# Altium PCB RFID_CC1101_433MHz.PcbDoc
Units mm, origin at the board's own origin, x right, y up, seen from the top; angles counter-clockwise.
Board outline 54 x 60 mm, 4 copper layers (Top Layer, GND Plane, POWER Plane, Bottom Layer), stack 0.414 mm thick; 90 components, 70 nets, 273 pads, 160 vias.
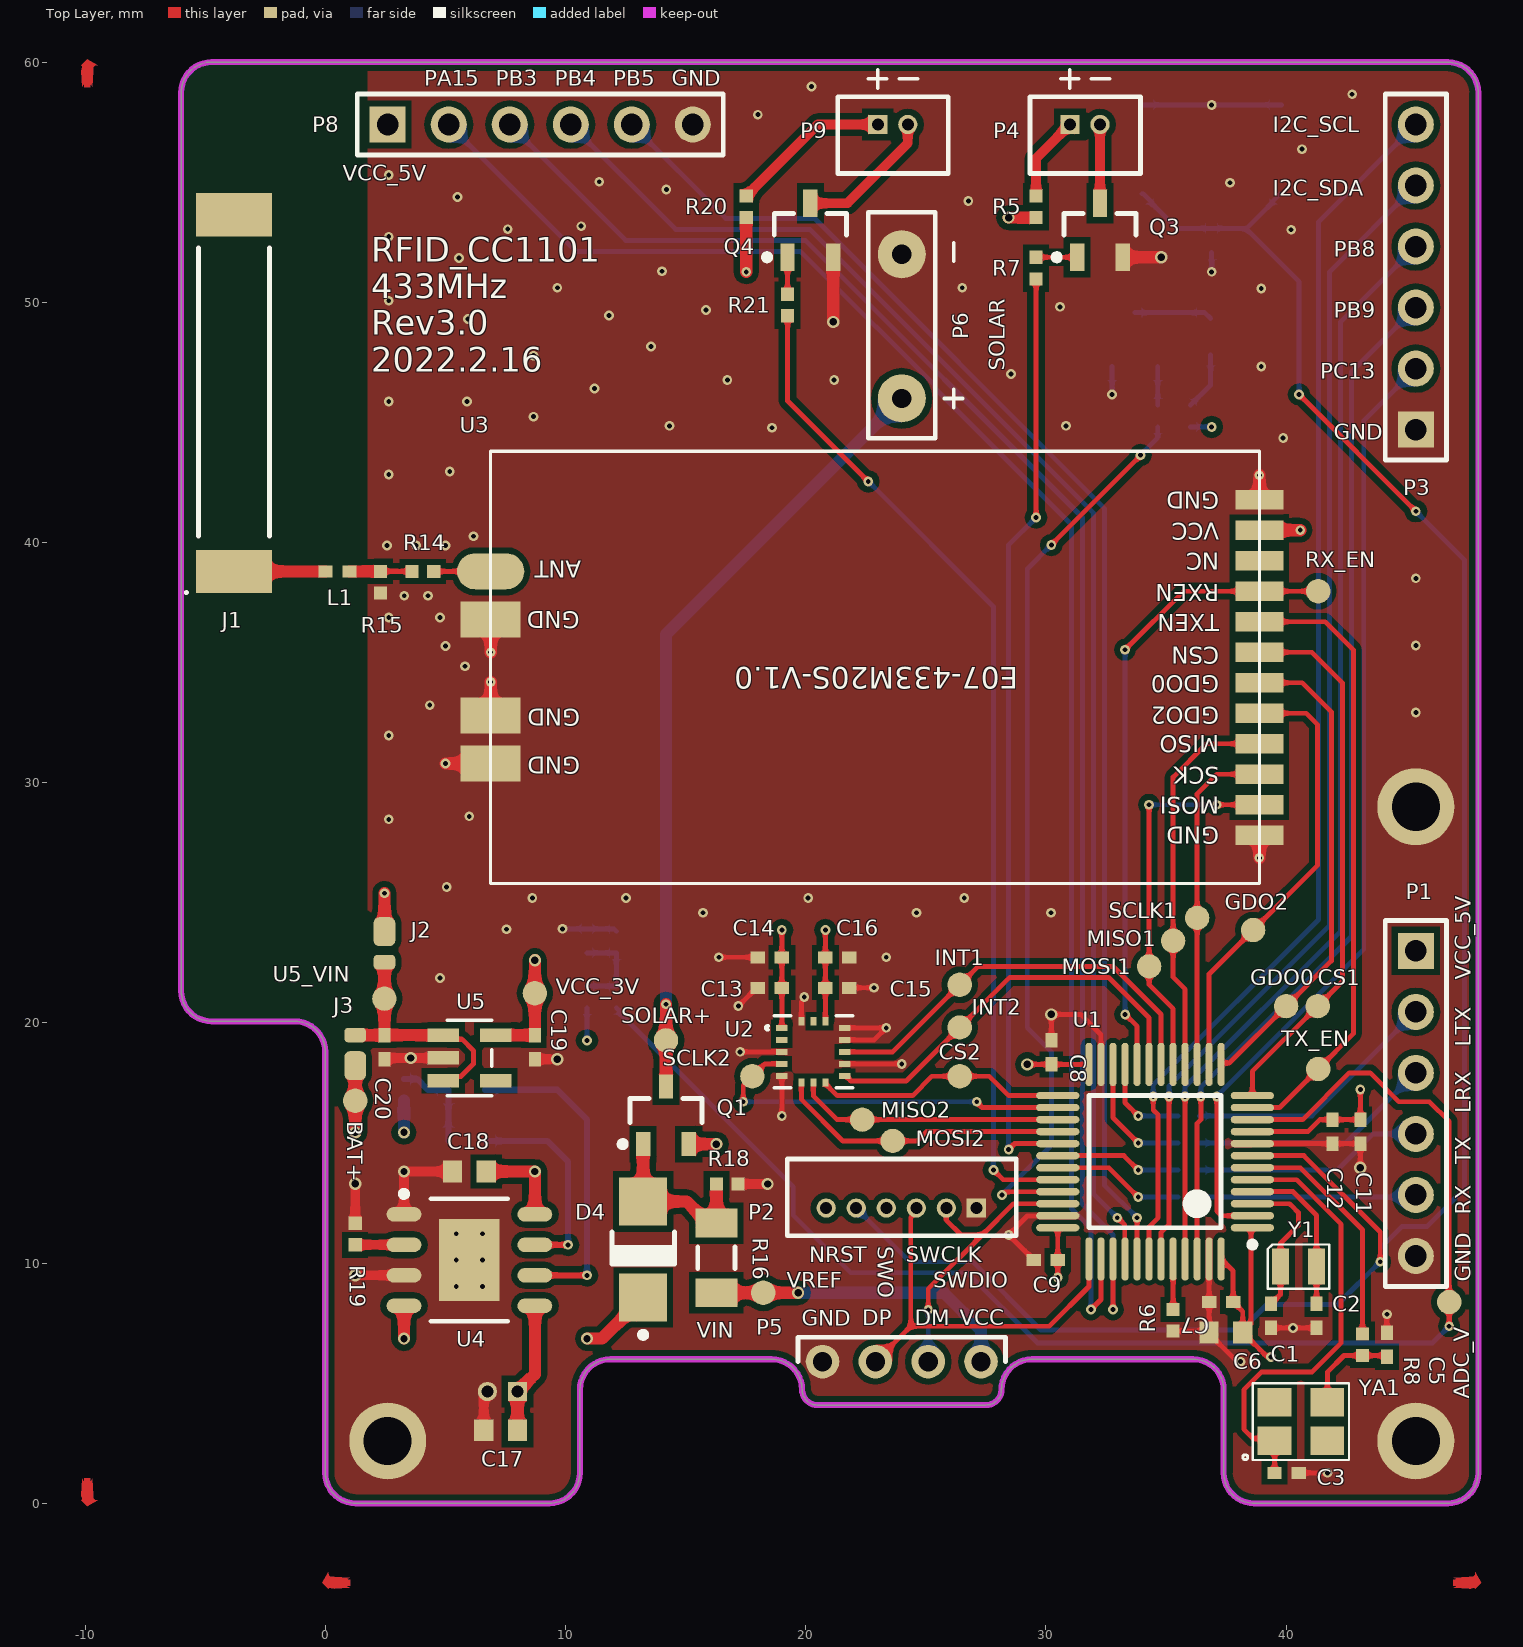
[diagram p0: Top Layer view]
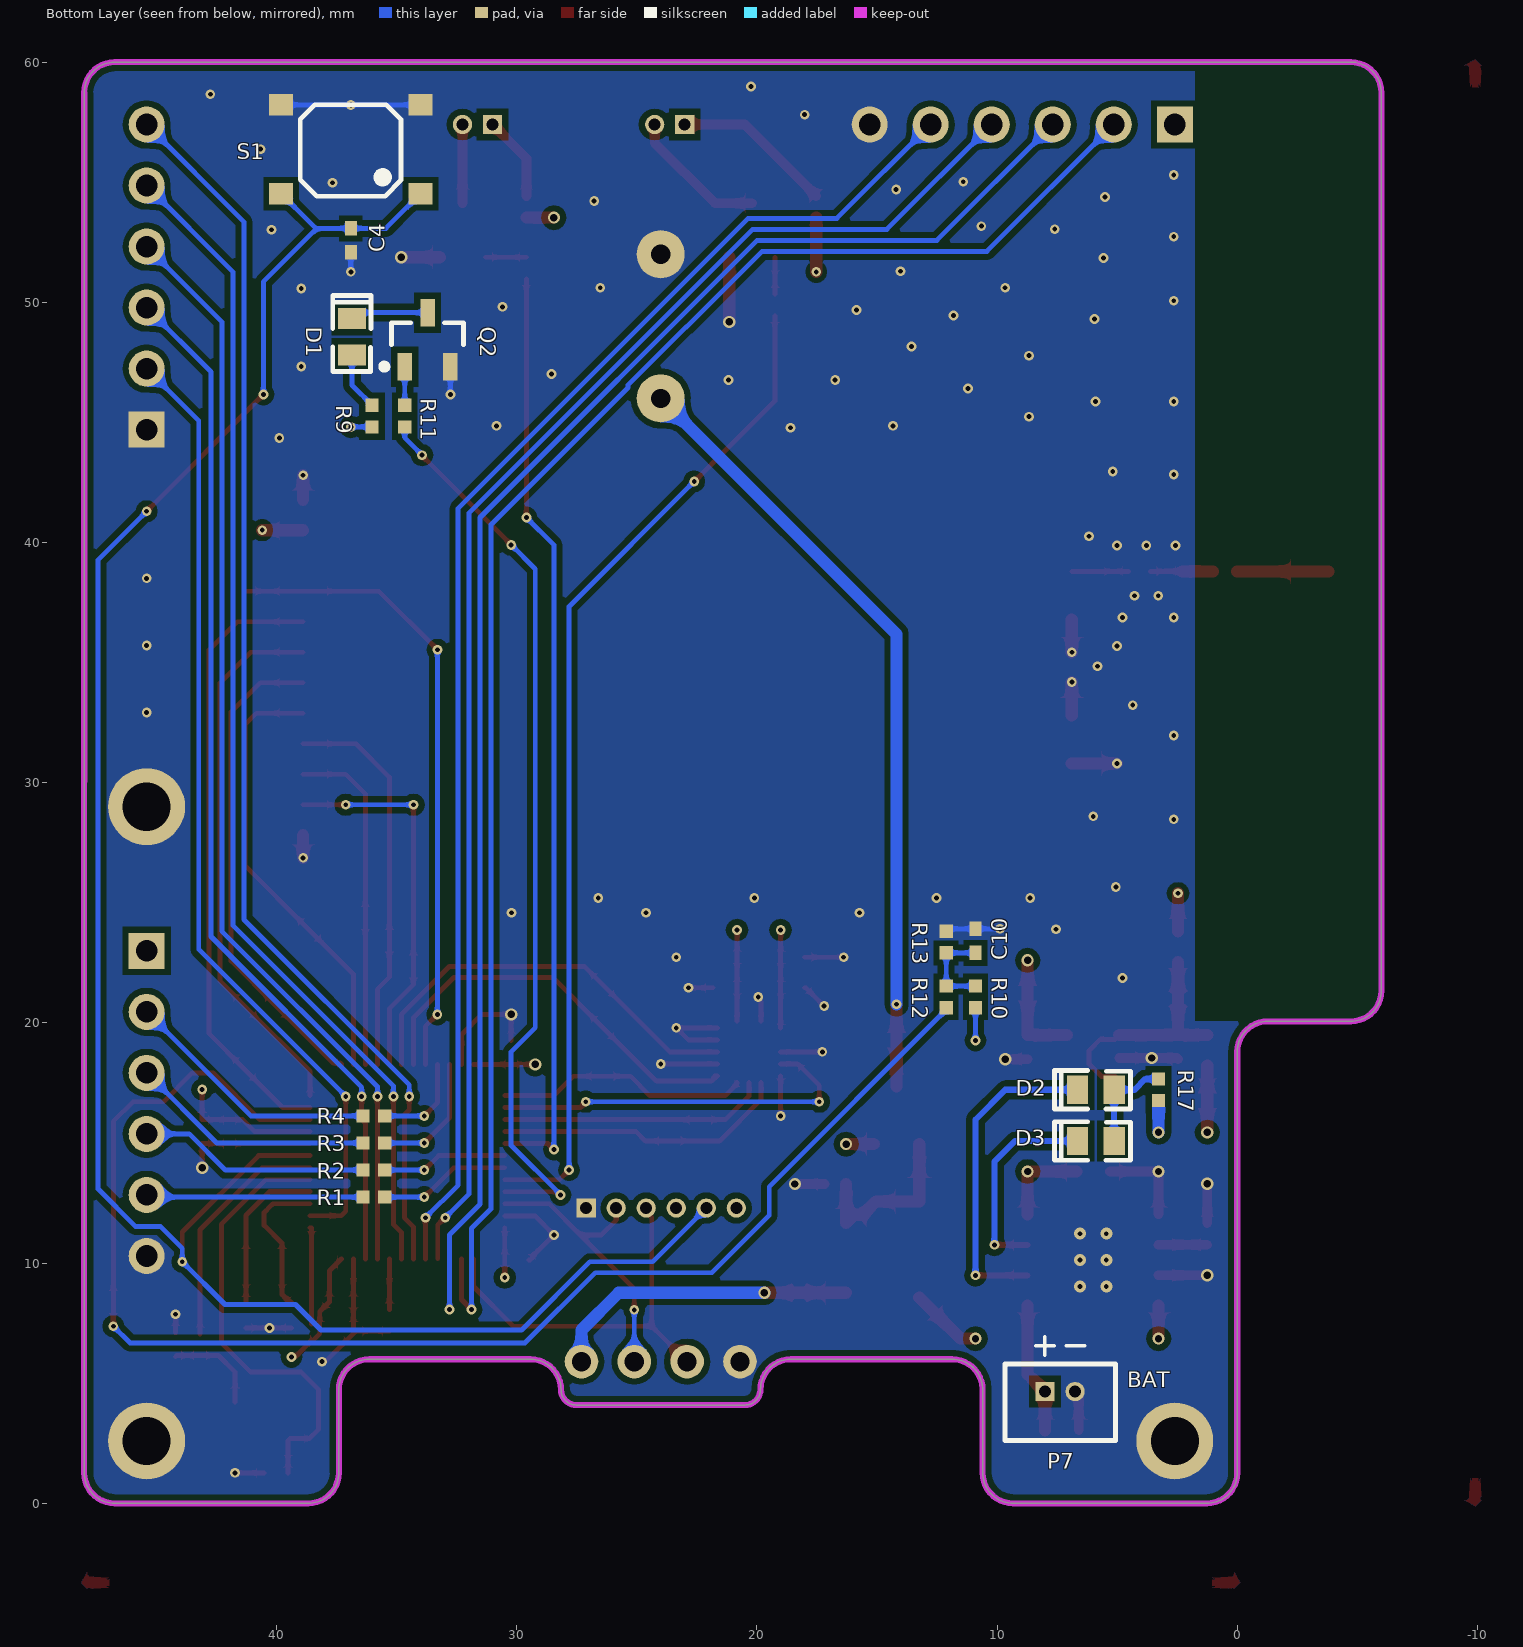
[diagram p1: Bottom Layer view, seen from below]
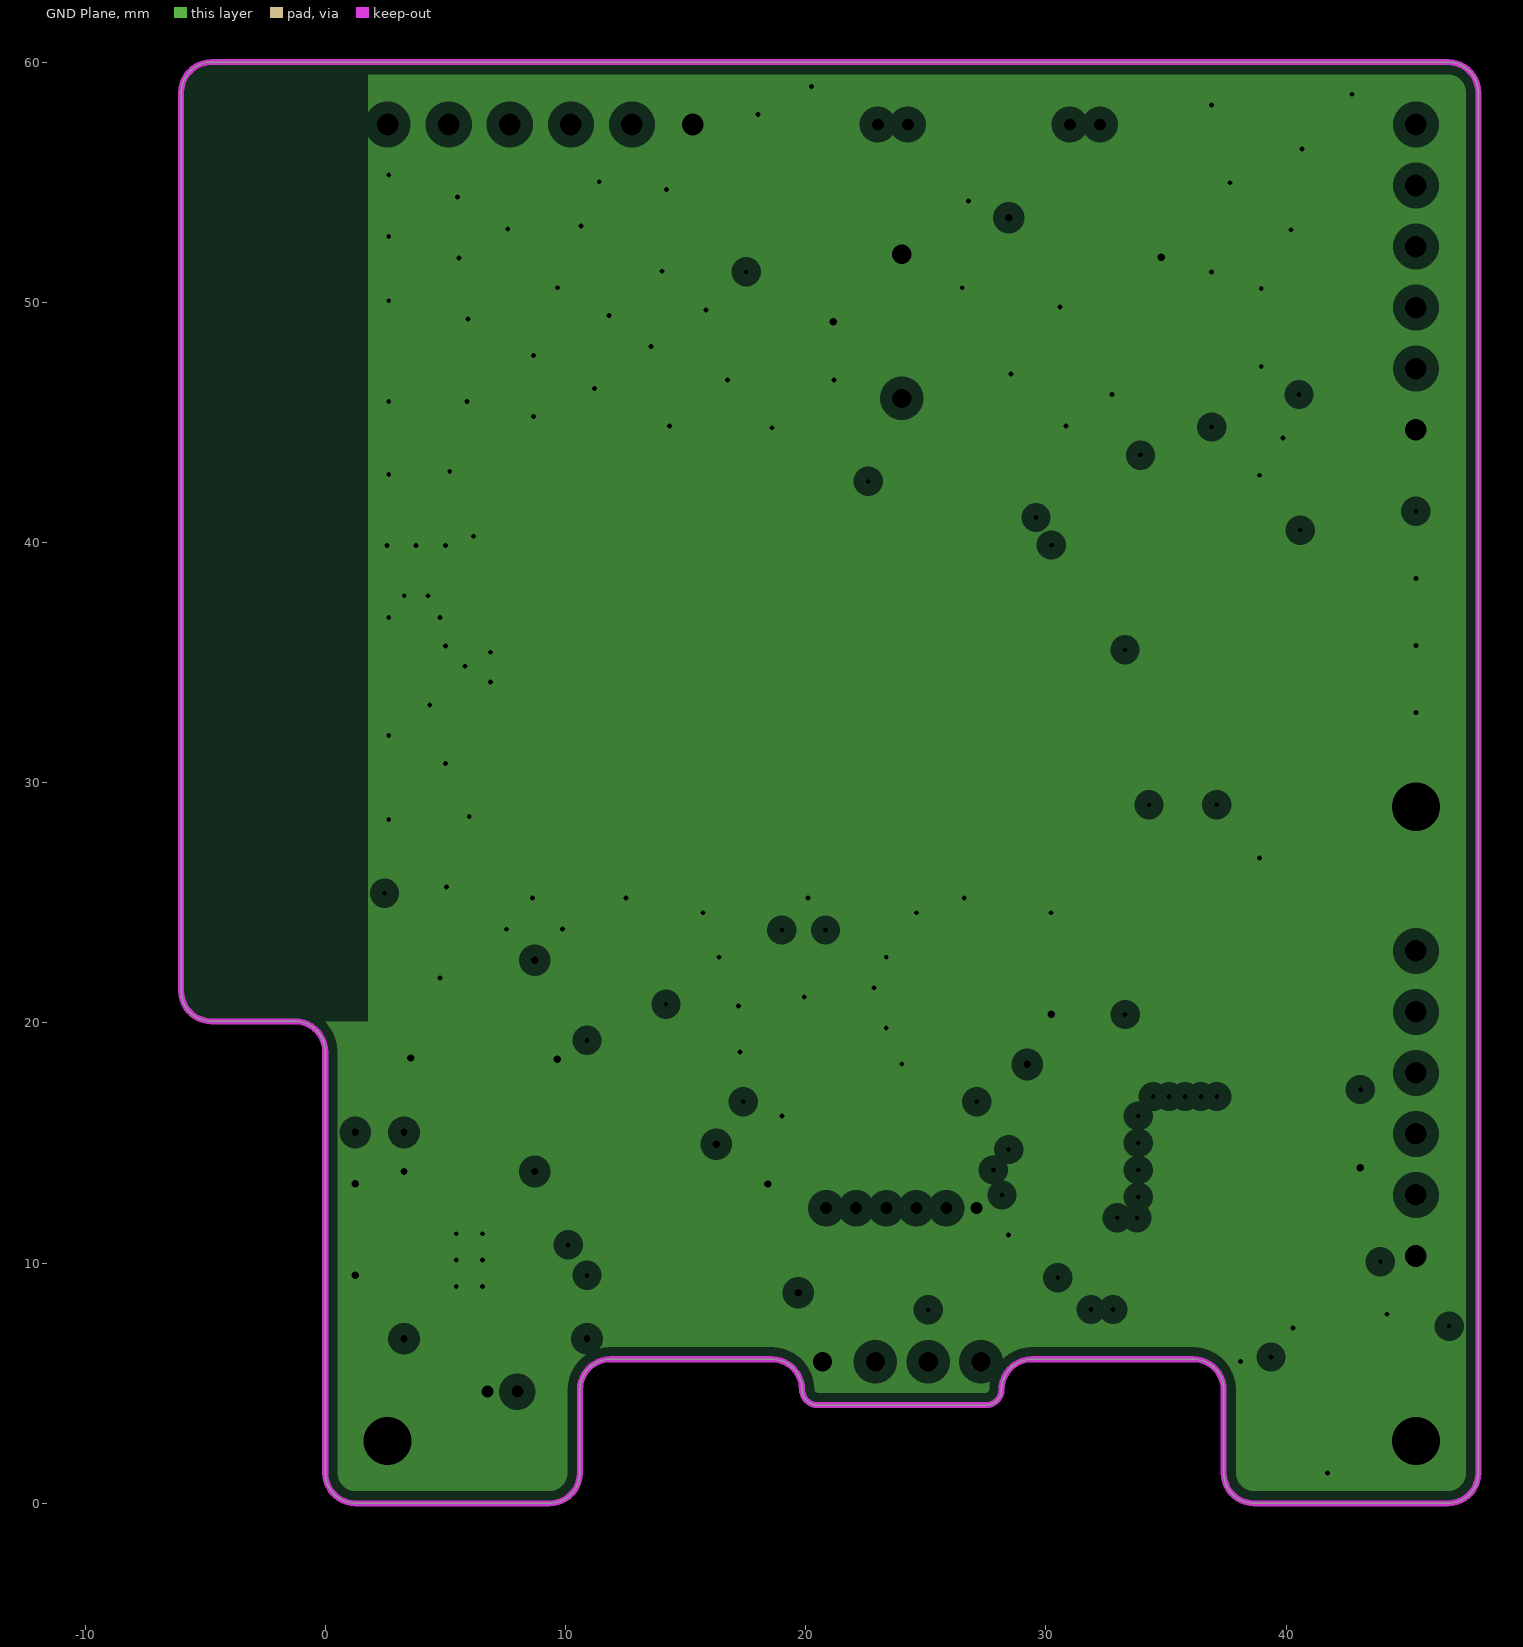
[diagram p2: GND Plane, clearances drawn from the general rule]
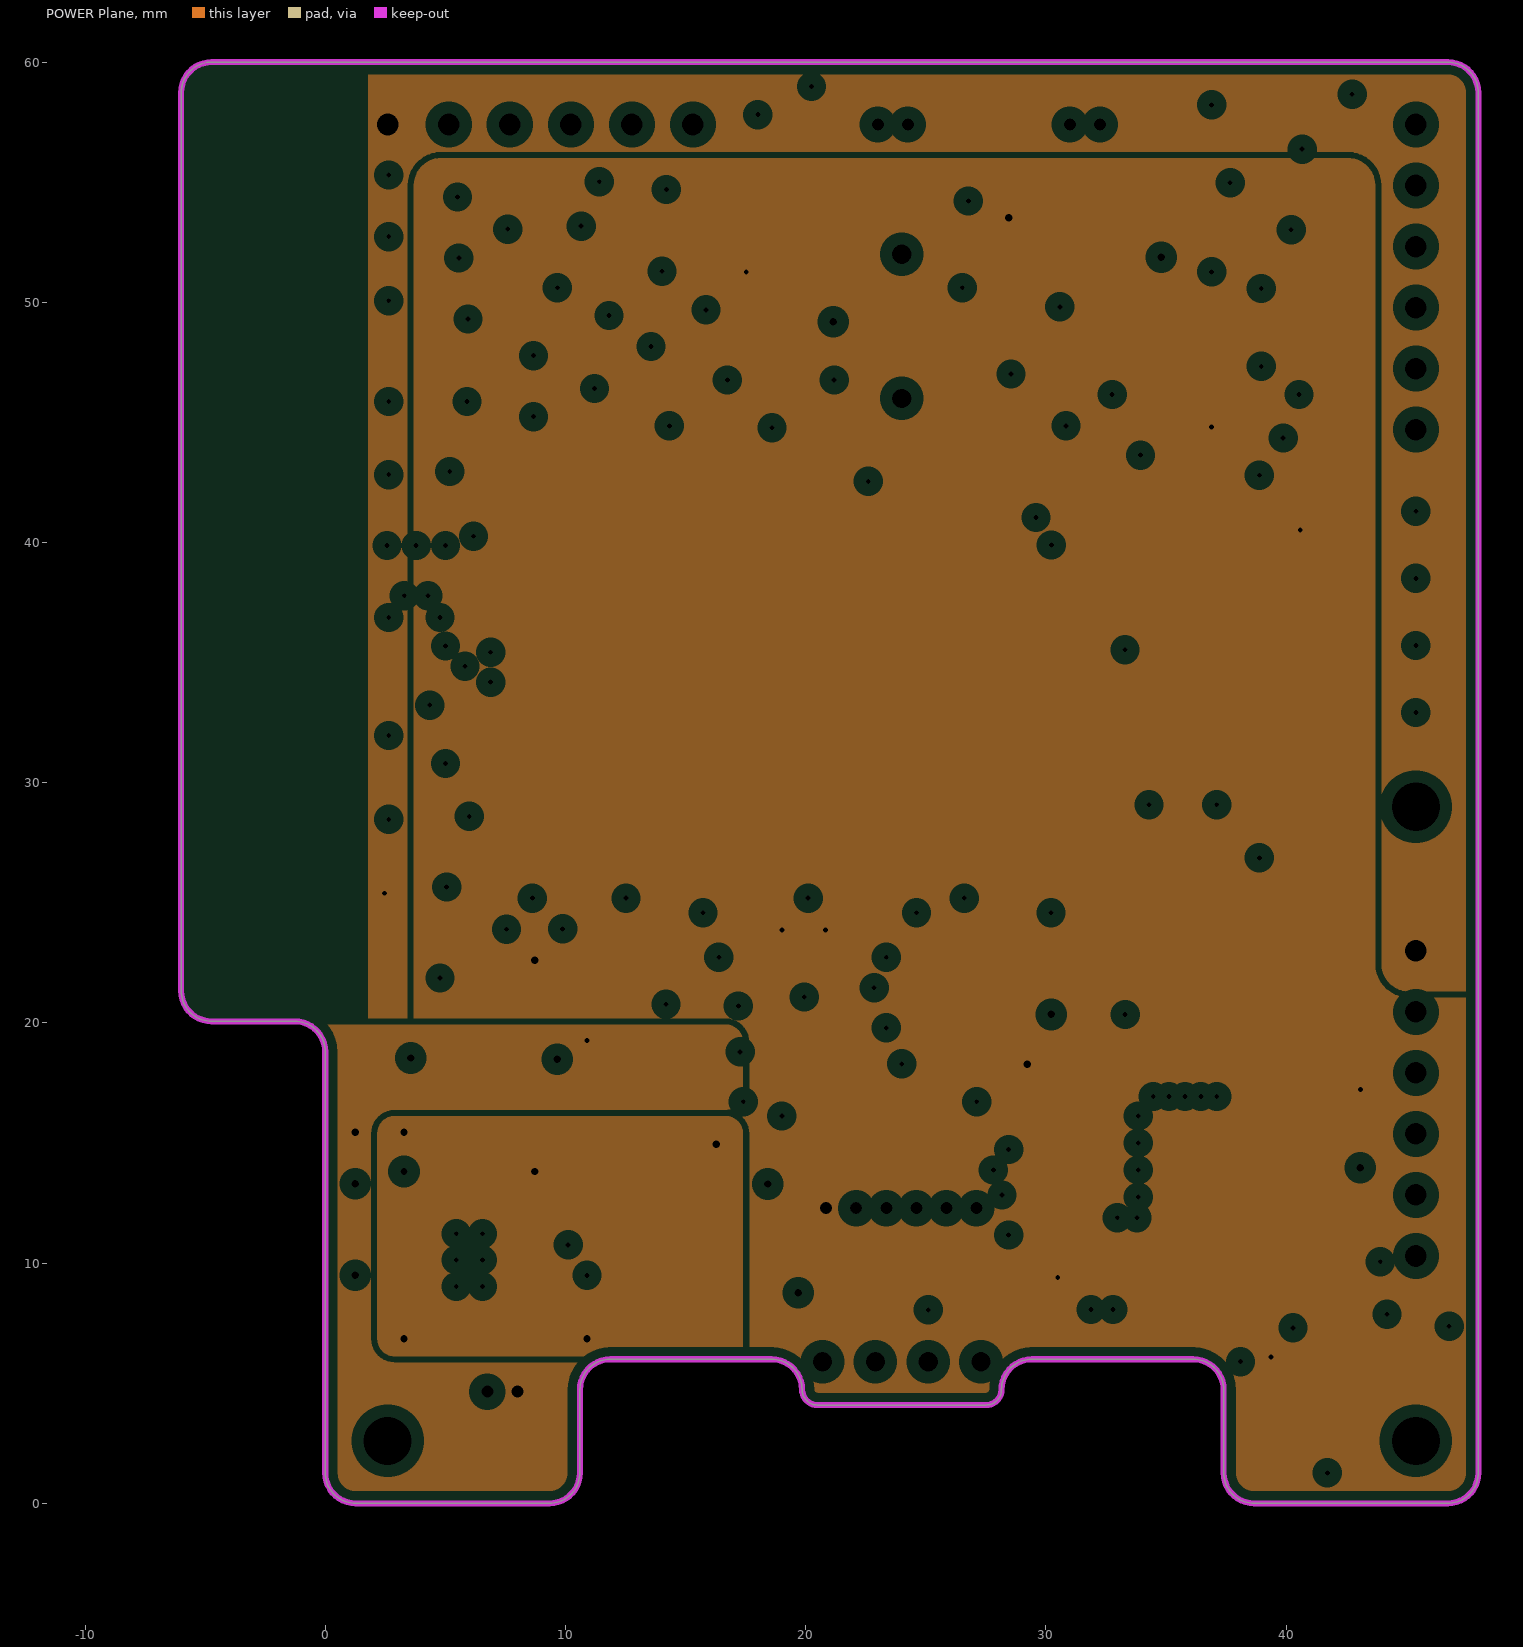
[diagram p3: POWER Plane, clearances drawn from the general rule]
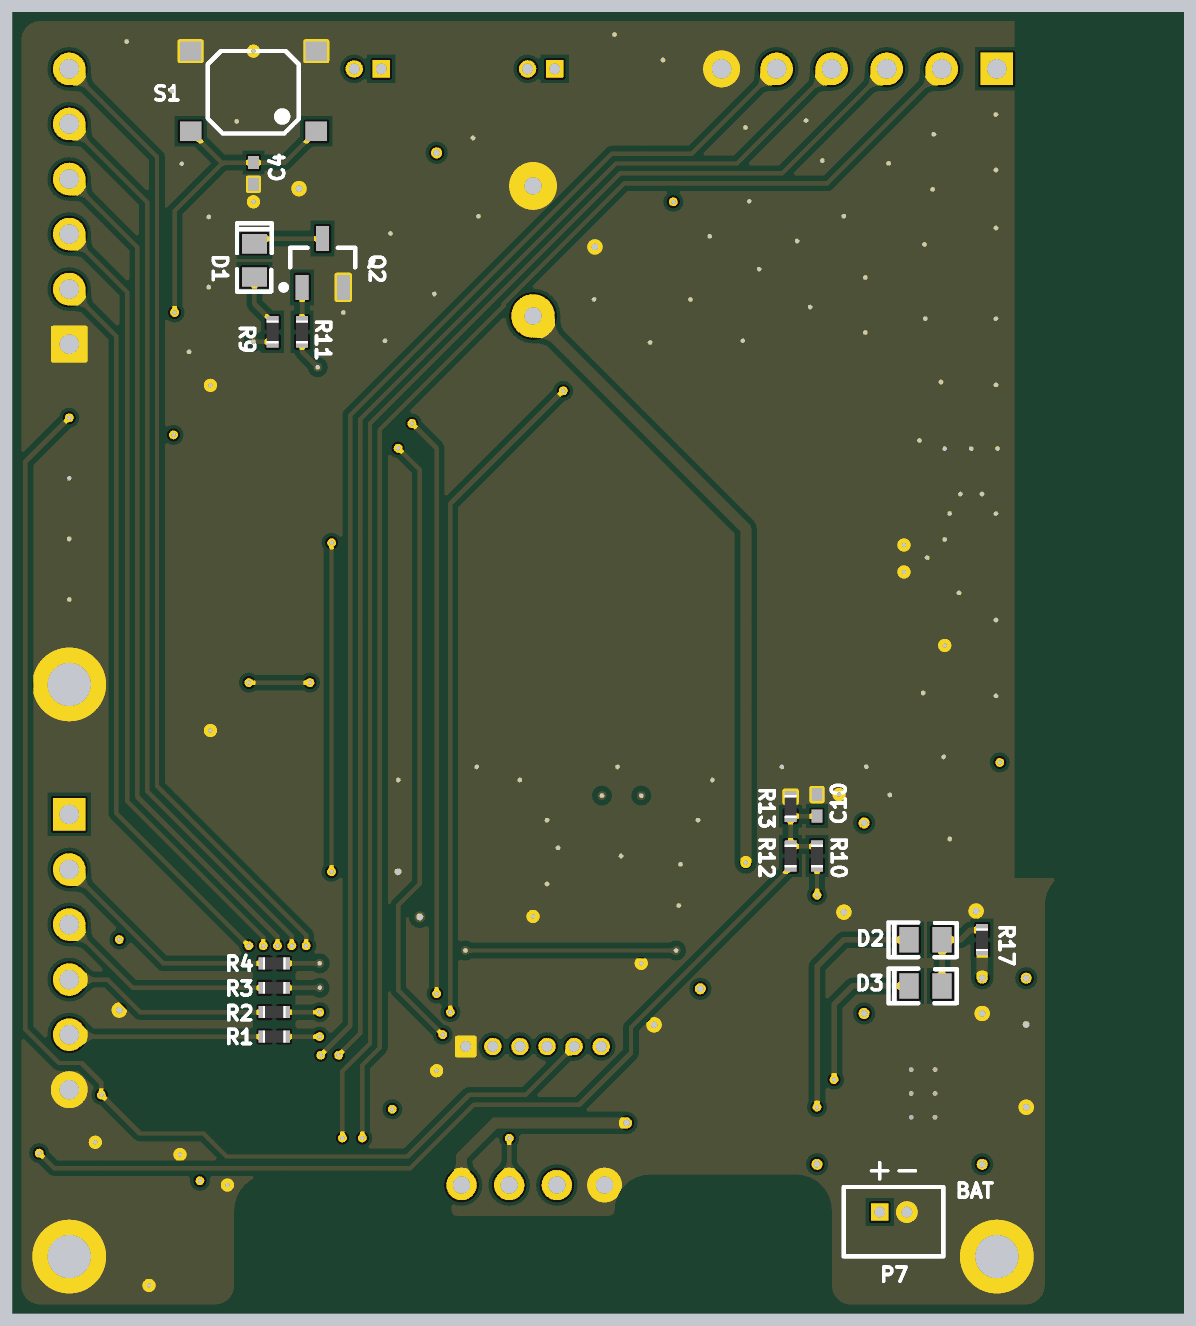
[diagram p4: 3D render of the assembled board from below, using the file's embedded part models]

## Layer stack, top to bottom
Top Solder: solder mask 0.0102, Solder Resist, Dk 3.5
Top Layer: signal copper 0.035
Dielectric 1: core 0.1016, Core-009, Dk 4.5
GND Plane: plane copper 0.035, net GND
Dielectric 3: prepreg 0.0711, PP-006, Dk 4.1
POWER Plane: plane copper 0.035, net (Multiple Nets)
Dielectric 2: core 0.1016, Core-009, Dk 4.5
Bottom Layer: signal copper 0.035
Bottom Solder: solder mask 0.0102, Solder Resist, Dk 3.5

## Board outline
1.27,0 9.33,0 ccw(c9.33,1.27) 10.6,1.27 10.6,4.73 cw(c11.87,4.73) 11.87,6 18.58,6 cw(c18.58,4.73) 19.85,4.73 ccw(c20.485,4.73) 20.485,4.095 27.515,4.095 ccw(c27.515,4.73) 28.15,4.73 cw(c29.42,4.73) 29.42,6 36.13,6 cw(c36.13,4.73) 37.4,4.73 37.4,1.27 ccw(c38.67,1.27) 38.67,0 46.73,0 ccw(c46.73,1.27) 48,1.27 48,58.727 ccw(c46.733,58.73) 46.736,59.997 46.736,60 -4.73,60 ccw(c-4.73,58.73) -6,58.73 -6,21.336 ccw(c-4.73,21.336) -4.73,20.066 -1.27,20.066 cw(c-1.27,18.796) 0,18.796 0,1.27 ccw(c1.27,1.27)

## Design rules (kind name [scope] priority, off if disabled: settings)
Clearance Clearance_8mil [(IsPad and InComponent('U1')) or (IsPad and InComponent('U2'))] p1: gap=0.203 ignorepadtopadclearanceinfootprint=TRUE
Clearance [All] p2: gap=0.254 ignorepadtopadclearanceinfootprint=FALSE except(0: Arc-Hole Track-Hole SMDPad-Hole THPad-Hole Via-Hole Fill-Hole Poly-Hole Region-Hole Text-Hole)
MinimumSolderMaskSliver [All] p1: minsoldermaskwidth=0.025
PlaneClearance [All] p1: clearance=0.508
PlaneConnect [All] p1: planeconnectstyle=Direct reliefexpansion=0.508 reliefentries=4 reliefconductorwidth=0.254 reliefairgap=0.254
PolygonConnect [All] p1: connectstyle=Direct reliefconductorwidth=0.254 reliefentries=4 polygonreliefangle="90 Angle" airgapwidth=0.254
RoutingVias [All] p1: holewidth=0.305 width=0.508 viastyle="Through Hole" minholewidth=0.203 minwidth=0.406 maxholewidth=0.711 maxwidth=1.27
SilkToSilkClearance [All] p1: silktosilkclearance=0.127
SilkToSolderMaskClearance [IsPad] p1: minsilkscreentomaskgap=0 clearancetoexposedcopper=TRUE
SolderMaskExpansion [All] p1: expansion=0.102 istentingtop=FALSE
Width Width_LED [InNetClass('led class')] p1: maxlimit=0.508 minlimit=0.203 preferedwidth=0.406
Width "Width Power" [InNetClass('power class')] p2: maxlimit=0.508 minlimit=0.203 preferedwidth=0.508
Width [All] p3: maxlimit=1.016 minlimit=0.203 preferedwidth=0.254
25 further rules are at their usual default settings.

## Classes and differential pairs
net class "led class": NetP4_1 NetP4_2 NetP9_1 NetP9_2
net class "power class": BAT+ GND NetC20_2 NetP4_2 NetP5_1 NetR19_2 SOLAR+ VCC VCC_3V VCC_5V
component class Power: BAT+ C17 C18 C19 C20 D2 D3 D4 J2 J3 P5 P6 P7 Q1 R16 R17 R18 R19 SOLAR+ U4 U5 U5_VIN VCC_3V VIN
component class MEMS&RF: C13 C14 C15 C16 J1 L1 R14 R15 U2 U3
component class MCU: ADC_V C1 C2 C3 C4 C5 C6 C7 C8 C9 C10 C11 C12 CS1 CS2 D1 GDO0 GDO2 INT1 INT2 MISO1 MISO2 MOSI1 MOSI2 P1 P2 P3 P4 P8 P9 Q2 Q3 Q4 R1 R2 R3 R4 R5 R6 R7 R8 R9 R10 R11 R12 R13 R20 R21 RX_EN S1 SCLK1 SCLK2 TX_EN U1 Y1 YA1

## Components (designator, comment, footprint, x,y, rotation, side; value= is the part's Value field where it differs from the comment)
ADC_V "TP-EMB-SMT-Single-20mil-1pin" EMB-SMT-40MILX40MIL 46.787,8.382 r90 top
BAT+ "TP-EMB-SMT-Single-20mil-1pin" EMB-SMT-40MILX40MIL 1.245,16.764 r90 top
C1 "10pF" 0402 39.37,7.805 r90 top
C2 "10pF" 0402 41.266,7.805 r90 top
C3 "18pF" 0402 40.017,1.27 r180 top
C4 "100nF" 0402 36.9,52.578 r90 bottom
C5 "18pF" 0402 44.196,6.604 r270 top
C6 "10uF" 1608[0603] 37.494,7.112 r0 top
C7 "100nF" 0402 37.294,8.382 r0 top
C8 "100nF" 0402 30.226,18.774 r270 top
C9 "100nF" 0402 29.994,10.128 r0 top
C10 "100nF" 0402 10.897,23.418 r270 bottom
C11 "1uF" 0402 43.089,15.474 r90 top
C12 "100nF" 0402 41.94,15.474 r90 top
C13 "100nF" 0402 18.507,21.463 r180 top
C14 "1uF" 0402 18.507,22.733 r180 top
C15 "100nF" 0402 21.32,21.463 r0 top
C16 "1uF" 0402 21.32,22.733 r180 top
C17 "10uF" 1608[0603] 7.3,3.048 r0 top
C18 "10uF" 1608[0603] 6,13.818 r180 top
C19 "1uF" 0402 8.725,18.992 r90 top
C20 "1uF" 0402 2.463,18.992 r90 top
CS1 "TP-EMB-SMT-Single-20mil-1pin" EMB-SMT-40MILX40MIL 41.314,20.701 r90 top
CS2 "TP-EMB-SMT-Single-20mil-1pin" EMB-SMT-40MILX40MIL 26.416,17.78 r90 top
D1 "Green" 0603/K 36.855,47.803 r90 bottom
D2 "Green" 0603/K 5.127,17.217 r0 bottom
D3 "Red" 0603/K 5.127,15.087 r0 bottom
D4 "SS24A" ONSC-SMA-2-403D-02_V 13.233,10.567 r90 top
GDO0 "TP-EMB-SMT-Single-20mil-1pin" EMB-SMT-40MILX40MIL 39.998,20.701 r90 top
GDO2 "TP-EMB-SMT-Single-20mil-1pin" EMB-SMT-40MILX40MIL 38.626,23.868 r90 top
INT1 "TP-EMB-SMT-Single-20mil-1pin" EMB-SMT-40MILX40MIL 26.416,21.59 r90 top
INT2 "TP-EMB-SMT-Single-20mil-1pin" EMB-SMT-40MILX40MIL 26.416,19.812 r90 top
J1 "CA-S01" CA-S01 -3.8,46.273 r90 top
J2 "NC" "1608[0603] - JUMPER" 2.463,23.293 r270 top
J3 "0Ω" "1608[0603] - JUMPER" 1.245,18.73 r90 top
L1 "100nH" 0402 0.508,38.798 r180 top
MISO1 "TP-EMB-SMT-Single-20mil-1pin" EMB-SMT-40MILX40MIL 35.294,23.419 r90 top
MISO2 "TP-EMB-SMT-Single-20mil-1pin" EMB-SMT-40MILX40MIL 22.352,15.977 r90 top
MOSI1 "TP-EMB-SMT-Single-20mil-1pin" EMB-SMT-40MILX40MIL 34.294,22.352 r90 top
MOSI2 "TP-EMB-SMT-Single-20mil-1pin" EMB-SMT-40MILX40MIL 23.622,15.087 r90 top
P1 "A2541WV-6P" A2541WV-6P 45.4,23 r270 top
P2 "A1251WV-6P" A1251WV-6P-SWD 27.104,12.294 r180 top
P3 "A2541WV-6P" A2541WV-6P 45.4,44.7 r90 top
P4 "A1251WV-2P" A1251WV-2P 31,57.4 r0 top
P5 "LBX0062A" LBX0062A 27.3,5.9 r180 top
P6 "SOLAR-PAD" SOLAR-PAD 24,46 r90 top
P7 "A1251WV-2P" A1251WV-2P 8,4.654 r180 bottom
P8 "A2541WV-6P" A2541WV-6P 2.6,57.4 r0 top
P9 "A1251WV-2P" A1251WV-2P 23,57.4 r0 top
Q1 "YJL2301CQ" SOT95P237X112-3N 14.183,16.154 r90 top
Q2 "S8050" SOT-23B_N 33.706,48.446 r90 bottom
Q3 "S8050" SOT-23B_N 32.25,53 r90 top
Q4 "S8050" SOT-23B_N 20.193,53 r90 top
R1 "33" RESC1005X04N 35.941,12.751 r0 bottom
R2 "33" RESC1005X04N 35.941,13.877 r180 bottom
R3 "33" RESC1005X04N 35.941,15.003 r0 bottom
R4 "33" RESC1005X04N 35.941,16.129 r0 bottom
R5 "1k" RESC1005X04N 29.591,53.975 r270 top
R6 "10k" RESC1005X04N 35.294,7.62 r270 top
R7 "1k" RESC1005X04N 29.591,51.425 r90 top
R8 "390" RESC1005X04N 43.18,6.604 r90 top
R9 "10k" RESC1005X04N 36.013,45.263 r270 bottom
R10 "100k" RESC1005X04N 10.897,21.082 r270 bottom
R11 "1k" RESC1005X04N 34.656,45.263 r90 bottom
R12 "0Ω" RESC1005X04N 12.116,21.082 r90 bottom
R13 "100k" RESC1005X04N 12.116,23.368 r270 bottom
R14 "0Ω" RESC1005X04N 4.064,38.798 r180 top
R15 "NC" RESC1005X04N 2.298,38.348 r90 top
R16 "0.4" RESC3216X07N 16.281,10.218 r90 top
R17 "1k" RESC1005X04N 3.275,17.217 r90 bottom
R18 "10k" RESC1005X04N 16.731,13.292 r180 top
R19 "1.2k" RESC1005X04N 1.245,11.213 r270 top
R20 "1k" RESC1005X04N 17.526,53.975 r270 top
R21 "1k" RESC1005X04N 19.243,49.886 r90 top
RX_EN "TP-EMB-SMT-Single-20mil-1pin" EMB-SMT-40MILX40MIL 41.334,37.973 r90 top
S1 "DPST-4" DPST 34,54.518 r0 bottom
SCLK1 "TP-EMB-SMT-Single-20mil-1pin" EMB-SMT-40MILX40MIL 36.294,24.371 r90 top
SCLK2 "TP-EMB-SMT-Single-20mil-1pin" EMB-SMT-40MILX40MIL 17.78,17.78 r90 top
SOLAR+ "TP-EMB-SMT-Single-20mil-1pin" EMB-SMT-40MILX40MIL 14.183,19.274 r90 top
TX_EN "TP-EMB-SMT-Single-20mil-1pin" EMB-SMT-40MILX40MIL 41.334,18.083 r90 top
U1 "STM32L051C8T6" STM-LQFP48_N 34.544,14.224 r180 top
U2 "ADXL362BCCZ" LGA_CC-16-4 20.32,18.796 r0 top
U3 "E07-433M20S" PE07-433M20S 22.885,34.798 r180 top
U4 "TP4056" ESOP-9N 6,10.128 r0 top
U5 "ADP151AUJZ-3.0-R7" UJ_5 6,18.542 r0 top
U5_VIN "TP-EMB-SMT-Single-20mil-1pin" EMB-SMT-40MILX40MIL 2.463,21.012 r90 top
VCC_3V "TP-EMB-SMT-Single-20mil-1pin" EMB-SMT-40MILX40MIL 8.725,21.236 r90 top
VIN "TP-EMB-SMT-Single-20mil-1pin" EMB-SMT-40MILX40MIL 18.236,8.768 r90 top
Y1 "32.768 kHz" XTAL-2012 39.766,9.858 r0 top
YA1 "12.0000000MHz" XTAL-SMT-4P 39.517,2.607 r0 top

## Footprints (in the part's own frame and the unit in brackets; to place one, negate y for a bottom-side part, rotate by r counter-clockwise, add the part's x,y. Pads: shape width x height; smd on the part's side, far side on the other; paste and mask are expansions set on the pad)
0402 [mm] "Chip Capacitor, Body 1.0x0.5mm, IPC High Density"
  rect 0.6x0.5 smd: 1(-0.5,0) 2(0.5,0)
  body extent -0.55,-0.3 0.55,0.3, height 1.3
0603/K [mil]
  rect 35x46 smd: A(0,0) K(60,0)
  silkscreen extent -27,-31 97,31
1608[0603] [mm] "Chip Capacitor, Body 1.6x0.8mm, IPC High Density"
  rect 0.8x0.9 smd: 1(-0.7,0) 2(0.7,0)
  body extent -0.87,-0.48 0.87,0.48, height 1.3
"1608[0603] - JUMPER" [mm] "jumper, Body 1.6x0.8mm, IPC High Density"
  rrect50% 1.2x0.9 smd: 1(-0.508,0)
  rrect50% 0.6x0.9 smd: 2(0.762,0)
  body extent -0.87,-0.48 0.87,0.48, height 1.3
A1251WV-2P [mm] "Connector; Header; 2 Position"
  rect 0.8x0.8 hole 0.5: 1(0,0)
  round 0.8 hole 0.5: 2(1.25,0)
  silkscreen extent -1.66,-2.05 2.93,2.29
A1251WV-6P-SWD [mm] "Connector; Header; 6 Position"
  rect 0.8x0.8 hole 0.5: 1(0,0)
  round 0.8 hole 0.5: 2(1.25,0) 3(2.5,0) 4(3.75,0) 5(5,0) 6(6.25,0)
  silkscreen extent -1.66,-2.05 7.87,1.15
A2541WV-6P [mm] "Connector; Header; 6 Position"
  rect 1.5x1.5 hole 0.9: 1(0,0)
  round 1.5 hole 0.9: 2(2.54,0) 3(5.08,0) 4(7.62,0) 5(10.16,0) 6(12.7,0)
  silkscreen extent -1.27,-1.27 13.97,1.27
CA-S01 [mm] "CorssAir Antenna, 2-Leads, Body 15.00x3.00mm, IPC Medium Density"
  rect 1.8x3.15 smd: 1(-7.475,0) 2(7.375,0)
  silkscreen extent -8.41,-1.47 6,2.03, body extent -7.6,-1.55 7.6,1.55, height 0.25
DPST [mm]
  rect 1x0.9 smd: 1(0,0) 2(5.8,0) 3(0,-3.7) 4(5.8,-3.7)
  silkscreen extent 0.81,-3.71 5,0.1
EMB-SMT-40MILX40MIL [mil] "testpoint"
  round 40 smd: 1(0,0)
ESOP-9N [mm] "ESOP, 8-Leads, Body 4.90x3.90mm, Pitch 1.27mm, Thermal Pad 3.41x2.52mm, IPC Medium Density, For TP4056"
  oval 1.45x0.6 smd: 1(-2.725,1.905) 2(-2.725,0.635) 3(-2.725,-0.635) 4(-2.725,-1.905) 5(2.725,-1.905) 6(2.725,-0.635) 7(2.725,0.635) 8(2.725,1.905)
  rect 2.52x3.41 smd: 9(0,0)
  silkscreen extent -2.85,-2.55 1.6,2.88, body extent -3,-2.55 3,2.55, height 1.75
LBX0062A [mm] "PogoPin; Connector; 4 Position"
  round 1.4 hole 0.8: 1(0,0) 2(2.2,0) 3(4.4,0) 4(6.6,0)
  silkscreen extent -1.02,-1.02 7.62,0
LGA_CC-16-4 [mm]
  rect 0.475x0.25 smd: 1(-1.313,1) 2(-1.313,0.5) 3(-1.313,0) 4(-1.313,-0.5) 5(-1.313,-1) 9(1.313,-1) 10(1.313,-0.5) 11(1.313,0) 12(1.313,0.5) 13(1.313,1)
  rect 0.25x0.35 smd: 6(-0.5,-1.275) 7(0,-1.275) 8(0.5,-1.275) 14(0.5,1.275) 15(0,1.275) 16(-0.5,1.275)
  silkscreen extent -1.98,-1.5 1.63,1.5, body extent 0,0 0.25,0.25, height 0.25
ONSC-SMA-2-403D-02_V [mm] "Molded, 2-Leads, Body 4.57x2.92mm"
  rect 2x2 smd: 1(-2,0) 2(2,0)
  silkscreen extent -3.67,-1.3 0.74,1.3, body extent -2.16,-1.3 2.16,1.3, height 2.2
PE07-433M20S [mm] "32mm*18mm*3.0mm-S"
  rect 2x0.8 smd: 1(-16,6.985) 2(-16,5.715) 3(-16,4.445) 4(-16,3.175) 5(-16,1.905) 6(-16,0.635) 7(-16,-0.635) 8(-16,-1.905) 9(-16,-3.175) 10(-16,-4.445) 11(-16,-5.715) 12(-16,-6.985)
  oval 2.8x1.5 smd: 13(16,-4)
  rect 2.5x1.5 smd: 14(16,-2) 15(16,2) 16(16,4)
  silkscreen extent -16,-9 16,9
RESC1005X04N [mm] "Chip Resistor, 2-Leads, Body 1.00x0.50mm, IPC Medium Density"
  rect 0.55x0.55 smd: 1(-0.45,0) 2(0.45,0)
  body extent -0.53,-0.28 0.53,0.28, height 0.4
RESC3216X07N [mm] "Chip Resistor, 2-Leads, Body 3.20x1.60mm, IPC Medium Density"
  rect 1.2x1.75 smd: 1(-1.45,0) 2(1.45,0)
  silkscreen extent -0.45,-0.77 0.45,0.77, body extent -1.7,-0.87 1.7,0.87, height 0.65
SOLAR-PAD [mm] "Connector; Header; 2 Position"
  round 2 hole 0.8: 1(0,0) 2(6,0)
  silkscreen extent -1.66,-2.54 7.75,1.4
SOT95P237X112-3N [mm] "SOT23, 3-Leads, Body 2.92x2.37mm, Pitch 0.95mm, IPC Medium Density"
  rect 1x0.6 smd: 1(-1.2,0.95) 2(-1.2,-0.95) 3(1.2,0)
  silkscreen extent -1.32,-1.5 0.7,1.92, body extent -1.32,-1.52 1.32,1.52, height 1.12
SOT-23B_N [mm] "SOT23, 3-Leads, Body 2.9x1.3mm, Pitch 0.95mm, Lead Span 2.4mm, IPC Medium Density"
  rect 1.15x0.6 smd: B(-1.125,0.95) C(1.125,0) E(-1.125,-0.95)
  silkscreen extent -1.25,-1.5 0.7,1.93, body extent -0.7,-1.5 0.7,1.5, height 1.14
STM-LQFP48_N [mm] "QFP, 48-Leads, Body 7x7mm, Pitch 0.5mm, IPC Medium Density"
  oval 1.8x0.3 smd: 1(-4.05,2.75) 2(-4.05,2.25) 3(-4.05,1.75) 4(-4.05,1.25) 5(-4.05,0.75) 6(-4.05,0.25) 7(-4.05,-0.25) 8(-4.05,-0.75) 9(-4.05,-1.25) 10(-4.05,-1.75) 11(-4.05,-2.25) 12(-4.05,-2.75) 25(4.05,-2.75) 26(4.05,-2.25) 27(4.05,-1.75) 28(4.05,-1.25) 29(4.05,-0.75) 30(4.05,-0.25) 31(4.05,0.25) 32(4.05,0.75) 33(4.05,1.25) 34(4.05,1.75) 35(4.05,2.25) 36(4.05,2.75)
  oval 0.3x1.8 smd: 13(-2.75,-4.05) 14(-2.25,-4.05) 15(-1.75,-4.05) 16(-1.25,-4.05) 17(-0.75,-4.05) 18(-0.25,-4.05) 19(0.25,-4.05) 20(0.75,-4.05) 21(1.25,-4.05) 22(1.75,-4.05) 23(2.25,-4.05) 24(2.75,-4.05) 37(2.75,4.05) 38(2.25,4.05) 39(1.75,4.05) 40(1.25,4.05) 41(0.75,4.05) 42(0.25,4.05) 43(-0.25,4.05) 44(-0.75,4.05) 45(-1.25,4.05) 46(-1.75,4.05) 47(-2.25,4.05) 48(-2.75,4.05)
  silkscreen extent -4.18,-2.75 2.75,3.57, body extent -3.5,-3.5 3.5,3.5, height 1.6
UJ_5 [mil] "5P,TSOT for ADP151AUJZ"
  rect 52x22 smd paste+0 mask+0: 1(-43,37.4) 2(-43,0) 3(-43,-37.4) 4(43,-37.4) 5(43,37.4)
  silkscreen extent -36,-62 36,62, body extent -55,-57 55,57, height 39
XTAL-2012 [mm] "NX2012SA, 2 pins, 2.0mmx1.2mm."
  rect 0.7x1.5 smd: 1(0,0) 2(1.5,0)
  silkscreen extent -0.53,-0.92 2.03,0.92
XTAL-SMT-4P [mm] "3225, 3.2mmx2.5mm"
  rect 1.4x1.2 smd: 1(0,0) 2(2.2,0) 3(2.2,1.6) 4(0,1.6)
  silkscreen extent -1.32,-0.8 3.1,2.4

## Part data
ADC_V BAT+ CS1 CS2 GDO0 GDO2 INT1 INT2 MISO1 MISO2 MOSI1 MOSI2 RX_EN SCLK1 SCLK2 SOLAR+ TX_EN U5_VIN VCC_3V VIN: "Test Point Designed for holding a standard probe lead"
C1 C2: library part CC0402FRNPO9BN100, "Capacitor (0402,NPO,10pF,DC 50V,±1%) YAGEO", LatestRevisionDate=29-May-2009, LatestRevisionNote="IPC-7351 Footprint Added.", PackageDescription="Chip Capacitor", PackageReference=C0402, Published=8-Jun-2000, Publisher="Altium Limited"
C3 C5: library part CC0402FRNPO9BN180, "Capacitor (0402,NPO,18pF,DC 50V,±1%) YAGEO", LatestRevisionDate=29-May-2009, LatestRevisionNote="IPC-7351 Footprint Added.", PackageDescription="Chip Capacitor", PackageReference=C0402, Published=8-Jun-2000, Publisher="Altium Limited"
C4 C7 C8 C9 C10 C12 C13 C15: library part GRM155R71H104KE14, "Capacitor (0402,X7R,100nF,DC 50V,±10%) Murata", LatestRevisionDate=29-May-2009, LatestRevisionNote="IPC-7351 Footprint Added.", PackageDescription="Chip Capacitor", PackageReference=C0402, Published=8-Jun-2000, Publisher="Altium Limited"
C6 C17 C18: library part GRM188R61E106MA73, "Capacitor(0603,X5R(EIA),10uF,DC 25V,+/-20 %) muRata", LatestRevisionDate=29-May-2009, LatestRevisionNote="IPC-7351 Footprint Added.", PackageDescription="Chip Capacitor", PackageReference=C0603, Published=8-Jun-2000, Publisher="Altium Limited"
C11 C14 C16 C19 C20: library part GRM155R61E105KE11, "Capacitor (0402,X5R,1uF,DC 25V,±10%) Murata", LatestRevisionDate=29-May-2009, LatestRevisionNote="IPC-7351 Footprint Added.", PackageDescription="Chip Capacitor", PackageReference=C0402, Published=8-Jun-2000, Publisher="Altium Limited"
D1 D2: library part XL-1608SYGC, "Standard 0603 SMD LED, Green, 1.6-2.2V", LatestRevisionDate=17-Jul-2002, LatestRevisionNote="Re-released for DXP Platform.", PackageDescription="SM LED; 2 Flat Leads", PackageReference=0603, PackageVersion=Feb-2002, Published=8-Jun-2000, Publisher="Altium Limited", Valid=Green
D3: library part XL-1608SURC, "Standard 0603 SMD LED, Red, 1.6-2.2V", LatestRevisionDate=17-Jul-2002, LatestRevisionNote="Re-released for DXP Platform.", PackageDescription="SM LED; 2 Flat Leads", PackageReference=0603, PackageVersion=Feb-2002, Published=8-Jun-2000, Publisher="Altium Limited", Valid=Red
D4: "Surface Mount Schottky Rectifier, 2-Pin SMA, VRRM=40V , VF=0.5V at IF=2.0A, -55~+125°C", Manufacturer=扬州扬杰电子科技股份有限公司, ComponentLink1Description="Manufacturer URL", ComponentLink1URL=https://www.vishay.com, ComponentLink2Description=Datasheet, ComponentLink2URL=https://www.vishay.com/product?docid=89008, ComponentLink3Description="Package Specification", ComponentLink3URL=http://www.vishay.com/docs/88869/packaging.pdf, Configuration=Single, IFSM Max (A)=50, Mounting Technology="Surface Mount", PackageDescription="2-Pin Small Molded Package, J-Bend Lead, Body 2.605 x 4.315 mm", PackageReference="DO-214AC (SMA)", Packing="Tape and Reel", PartNumber=SS24A, RoHS=TRUE, VRRM(V)=40
J1: "CrossAir Antenna，广州寒武纪电子科技有限公司", LatestRevisionDate=17-Jul-2002, LatestRevisionNote="Re-released for DXP Platform.", Publisher="Altium Limited"
J2 J3: library part RC0603JR-JUMP, "Resistor 0603(1608) 0Ω jumper", PackageDescription="Chip Resistor, 2-Leads, Body 1.60x0.80mm, IPC Medium Density", PackageReference=0603
L1: library part LQW15ANR10J00, "Inductor, 100n, 0402, ±5%, wire-wound type Murata", LatestRevisionDate=29-May-2009, LatestRevisionNote="IPC-7351 Footprint Added.", PackageDescription=Inductor, PackageReference=0402, Published=8-Jun-2000, Publisher="Altium Limited"
P1 P3 P8: "Header, 6-Pin, 针座-2.54mm间距，180度，DIP排针", LatestRevisionDate=17-Jul-2002, LatestRevisionNote="Re-released for DXP Platform.", Publisher="Altium Limited"
P2: "Header, 6-Pin, 1.25mm PITCH, 180° WAFER", LatestRevisionDate=17-Jul-2002, LatestRevisionNote="Re-released for DXP Platform.", Publisher="Altium Limited"
P4 P7 P9: "Header, 2-Pin, 1.25mm PITCH, 180° WAFER", LatestRevisionDate=17-Jul-2002, LatestRevisionNote="Re-released for DXP Platform.", Publisher="Altium Limited"
P5: "PogoPinLBX0062A, 4-Pin", LatestRevisionDate=17-Jul-2002, LatestRevisionNote="Re-released for DXP Platform.", Publisher="Altium Limited"
P6: "Header, 2-Pin", LatestRevisionDate=17-Jul-2002, LatestRevisionNote="Re-released for DXP Platform.", Publisher="Altium Limited"
Q1: "P-Channel Enhancement Mode Field Effect Transistor,VDS=-20V,VGS=±10V,ID=-3.4A,VGS(th)Min=-0.4V,SOT-23", LatestRevisionDate=17-Jul-2002, LatestRevisionNote="Re-released for DXP Platform.", PackageDescription="SOT23, 3-Leads, Body 2.92x2.37mm, Pitch 0.95mm, IPC Medium Density", PackageReference=SOT23, PackageVersion=1995/1996, Published=8-Jun-2000, Publisher="Altium Limited"
Q2 Q3 Q4: "NPN General Purpose Amplifier, -55 to +150°C", Manufacturer=扬州扬杰电子科技股份有限公司, Package=SOT-23, IC(mA)=500, PC(mW)=300, VCBO(V)=40, VCEO(V)=25, VEBO(V)=5
R1 R2 R3 R4: library part RC0402FR-0733RL, "Resistor 0402(1005) 33Ω ±1%", PackageDescription="Chip Resistor, 2-Leads, Body 1.00x0.50mm, IPC Medium Density", PackageReference=0402
R5 R7 R11 R17 R20 R21: library part RC0402FR-071KL, "Resistor 0402(1005) 1kΩ ±1%", PackageDescription="Chip Resistor, 2-Leads, Body 1.00x0.50mm, IPC Medium Density", PackageReference=0402
R6 R9 R18: library part RC0402FR-0710KL, "Resistor 0402(1005) 10kΩ ±1%", PackageDescription="Chip Resistor, 2-Leads, Body 1.00x0.50mm, IPC Medium Density", PackageReference=0402
R8: library part RC0402FR-07390RL, "Resistor 0402(1005) 390Ω ±1%", PackageDescription="Chip Resistor, 2-Leads, Body 1.00x0.50mm, IPC Medium Density", PackageReference=0402
R10 R13: library part RC0402FR-07100KL, "Resistor 0402(1005) 100kΩ ±1%", PackageDescription="Chip Resistor, 2-Leads, Body 1.00x0.50mm, IPC Medium Density", PackageReference=0402
R12 R14 R15: library part RC0402JR, "Resistor 0402(1005) 0Ω", PackageDescription="Chip Resistor, 2-Leads, Body 1.00x0.50mm, IPC Medium Density", PackageReference=0402
R16: library part PE1206FRF470R4L, "Resistor 1206(3216) 0.4Ω ±1% 1W AUTOMOTIVE GRADEPE_L series", PackageDescription="Chip Resistor, 2-Leads, Body 3.20x1.60mm, IPC Medium Density", PackageReference=1206
R19: library part RC0402FR-071K2L, "Resistor 0402(1005) 1.2kΩ ±1%", PackageDescription="Chip Resistor, 2-Leads, Body 1.00x0.50mm, IPC Medium Density", PackageReference=0402
S1: library part CX-G001, "5.2*5.2轻触开关", LatestRevisionDate=17-Jul-2002, LatestRevisionNote="Re-released for DXP Platform.", PackageDescription="Switch; 4 Leads", PackageReference=DPST-4, Published=24-Mar-1999, Publisher="Altium Limited"
U1: "Access line ultra-low-power 32-bit MCU Arm®-based Cortex®-M0+, 64 KB Flash, 8 KB SRAM,2 KB EEPROM, 38 fast I/Os, 48-pin LQFP, -40 to 125 degC, Tray", I/Os (High Current)=37, Operating Frequency(F) (Processor speed) (MHz)=32, Supplier Part Number 1=497-11517-ND, Supply Voltage(Vcc) min (V)=2, A/D Converter=2x12-bit, ComponentLink1Description="Manufacturer URL", ComponentLink1URL=http://www.st.com/web/en/home.html, ComponentLink2Description=Datasheet, ComponentLink2URL=http://www.st.com/st-web-ui/static/active/en/resource/technical/document/datasheet/CD00161566.pdf, ComponentLink3Description="Package Specification", ComponentLink3URL=http://www.st.com/st-web-ui/static/active/en/resource/technical/document/datasheet/DM00058181.pdf, Core="ARM Cortex-M0+", DatasheetVersion="Rev. 16", FLASH Size (Prog) (kB)=64, Internal RAM Size (kB)=20, Mounting Technology="Surface Mount", PackageDescription="48-Pin Low Profile Quad Flat Package, 7 x 7 mm Body, 0.5 mm Pitch", PackageReference=LQFP48, PackageVersion="Rev. 6, 06/2013", Packing=Tray, PartNumber=STM32L051C8T6, Supplier 1=Digi-Key, Supplier 2=Farnell, Supplier 3=Newark, Supplier 4=Mouser, Supplier Part Number 2=1899017, Supplier Part Number 3=72T2644, Supplier Part Number 4=511-STM32L051C8T6
U2: "ADXL362, LGA, CC-16-4."
U3: "E07-433M20S是基于美国原装进口CC1101由成都亿佰特设计生产的大功率CC1101无线模块，默认发射功率为100mW、内置PA的模块，做到了功耗与性能的平衡。SPI接口，收发一体，可以工作在433MHz主流ISM频段，支持开发低功耗，目前已经多种场景中广泛应用", frequency(MHz)=433, Iout(max)(mA)=100, Isupply(uA)=2, Vin(V)=2.1-3.6
U4: "1A线性锂离子电池充电器"
U5: library part ADP151, "The ADP151 is an ultralow noise, low dropout (LDO) linear regulator that operates from 2.2 V to 5.5 V and provides up to 200 mA of output current.", Dropout Voltage(mV)=140, Iout(max)(mA)=200, Isupply(uA)=10, RMS Niose(uV)=9, Vin(V)=2.2-5.5, Vout(V)="1.1, 1.2, 1.5, 1.8, 2.1, 2.5, 2.6, 2.75, 2.8, 2.85, 3.0, 3.3"
Y1: library part 7RC32768F12UC, "Crystal Oscillator, 2.0×1.2×0.6 mm, 2 Pins, 32.768kHz, -40°C~+85°C, 12pF", Frequency Tolerance="±5ppm, ±10ppm, ±20ppm (max.) at 25°C", Load Capacitance=12pF, Manufacturer=SJK, Operating Temperature Range="Re-released for DXP Platform.", Package size (L×W×H)="2.0×1.2×0.60 mm", Frequency Range="32.768 kHz", PackageReference=-40°C~+85°C
YA1: library part 7U12000E12UCG, "Crystal Oscillator, 3.2×2.5×0.70 mm, 4 Pins, 12.000MHz, -40°C~+85°C, 12pF, ±10PPM", Frequency Tolerance="±10ppm max", Load Capacitance(CL)=12.0pF, Manufacturer=SJK, Operating Temperature Range="-40 °C to +85°C", Package size (L×W×H)="3.2×2.5×0.70 mm", Shunt Capacitance="3.0 pF Max", Frequency Range=12.0000000MHz, Mode=AT/Fundamental

## Free pads (board coordinates)
  round 3.2 hole 2: 6(2.6,2.6) 7(45.4,2.6) 8(45.4,29)

## Via types
v1: diameter 0.406, hole 0.203, Top Layer to Bottom Layer, 134 vias
v2: diameter 0.508, hole 0.305, Top Layer to Bottom Layer, 20 vias
v3: diameter 0.5, hole 0.2, Top Layer to Bottom Layer, 6 vias

## Nets (pads, with @x,y where several pads share a name; then routed paths per layer and width w, separated by ;. In a path a pad name is that pad's centre, name@x,y a point inside that pad or via, vN(x,y) a via of type N, cw(c..) or ccw(c..) an arc to the next point about the centre after c; other vN are vias at no path point)
ADC_V: ADC_V.1 R12.1 U1.10 | length 59.8
  Top Layer w0.203: U1.10 40.687,15.974 42.633,17.92 43.497,17.92 44.696,16.721 45.966,16.721 46.787,15.9 ADC_V.1 v1(46.787,7.373)
  Bottom Layer w0.203: R12.1 12.289,20.459 12.289,20.375 19.482,13.183 19.482,11.989 21.869,9.601 26.727,9.601 29.648,6.68 46.094,6.68 v1(46.787,7.373)
BAT+: BAT+.1 C17.2 J3.1 P7.1 R10.2 U4.5 | length 9.6
  Top Layer w0.508: v2(1.245,15.443) BAT+.1 J3.1 ; C17.2 P7.1 8.725,5.379 U4.5
  Bottom Layer w0.203: v1(10.897,19.274) R10.2
GDO0: GDO0.1 U1.13 U3.6 | length 20.2
  Top Layer w0.203: U1.13 37.294,18.288 37.339,18.333 37.63,18.333 GDO0.1 41.883,22.586 41.883,32.95 40.67,34.163 U3.6
GDO2: GDO2.1 U1.14 U3.5 | length 18.6
  Top Layer w0.203: U1.14 36.794,22.037 GDO2.1 41.3,26.543 41.3,32.426 40.834,32.893 U3.5
GND: C1.1 C2.1 C3.1 C4.1 C5.1 C6.1 C7.1 C8.1 C9.1 C10.1 C11.1 C12.1 C13.2 C14.2 C15.2 C16.1 C17.1 C18.2 C19.1 C20.1 P1.6 P2.1 P3.1 P5.4 P6.2 P7.2 P8.6 pad.6 pad.7 pad.8 Q2.E Q3.E Q4.E R6.2 R13.1 R15.1 R18.1 R19.1 S1.3 S1.4 U1.8 U1.23 U1.35 U1.47 U2.3 U2.5 U2.10 U2.12 U2.13 U2.16 U3.1 U3.12 U3.14 U3.15 U3.16 U4.1 U4.3 U4.9 U5.2 | length 73.4
  Top Layer w0.203: v1(16.383,22.733) C14.2 ; v1(17.195,20.701) 17.957,21.463 C13.2 ; v1(17.272,18.796) U2.3 ; v1(19.007,16.129) U2.5 ; U2.16 19.82,20.88 19.939,21 v1(19.939,21.082) ; U2.10 v1(24,18.296) ; U2.12 22.852,19.296 v1(23.352,19.796) U2.13 ; C15.2 v1(22.848,21.463) ; v1@28.446,11.178 29.234,11.966 U1.35@30.486,11.966 ; v1(28.448,11.176) 28.448,11.174 29.296,10.326 29.296,10.276 29.444,10.128 C9.1 ; C8.1 v2(30.226,20.355) 31.445,20.355 32.294,19.506 U1.23 ; R6.2 36.686,7.17 C6.1@36.794,7.062 ; U1.47 C6.1 C6.1@36.794,7.062 ; v1(38.1,5.9) 38.042,5.958 37.898,5.958 C6.1@36.794,7.062 ; U1.8 C12.1 C11.1 v2(43.089,13.974) ; C1.1 v1(40.289,7.305) C2.1 ; C3.1 v1(41.717,1.27) ; C5.1 v1(44.196,7.874)
  Top Layer w0.406: v2(1.245,9.493) U4.3 ; R19.1 v2(1.245,13.307) ; C20.1 2.463,18.495 2.51,18.542 v2(3.556,18.542) U5.2 ; U4.1 v2(3.275,13.818) C18.2 ; C17.1 6.6,4.397 6.75,4.547 P7.2 ; C19.1 v2(9.656,18.492) ; R18.1 v2(18.415,13.292)
  Top Layer w0.508: v1(5.004,30.798) U3.16 ; U3.15 v1(6.885,34.188) ; v1(6.885,35.433) U3.14 ; v2(21.143,49.186) Q4.E ; Q3.E v2(34.798,51.875) ; v1(38.885,26.873) U3.1 ; U3.12 v1(38.885,42.799)
  Bottom Layer w0.203: v1(9.881,23.918) C10.1 12.016,23.918 R13.1 ; v1(32.756,46.162) Q2.E ; S1.3 v1(36.9,58.218) S1.4 ; v1(36.9,51.268) C4.1
  other v1: 4.775,21.871 23.352,22.733 7.541,23.903 15.723,24.588 24.613,24.588 30.215,24.588 8.62,25.196 12.522,25.196 20.102,25.196 26.6,25.196 5.055,25.657 2.644,28.475 5.994,28.602 2.644,31.968 45.4,32.92 4.349,33.228 5.817,34.85 5.004,35.688 45.4,35.714 2.644,36.882 4.775,36.882 3.289,37.782 4.28,37.782 45.4,38.508 2.565,39.878 3.785,39.878 5.004,39.878 6.172,40.259 2.642,42.826 5.182,42.953 39.876,44.35 18.598,44.777 14.326,44.858 30.836,44.858 8.671,45.239 2.644,45.874 5.898,45.874 11.211,46.408 16.739,46.763 21.184,46.763 28.55,47.017 38.964,47.332 8.671,47.779 13.564,48.16 5.944,49.303 11.811,49.454 15.85,49.684 30.582,49.811 2.642,50.065 38.964,50.573 9.661,50.605 26.518,50.605 14.021,51.294 5.563,51.843 2.644,52.732 40.208,53.021 7.595,53.045 10.652,53.17 26.772,54.214 5.505,54.383 14.199,54.695 37.668,54.977 11.405,55.018 2.644,55.295 40.665,56.374 18.009,57.812 42.748,58.66 20.24,58.981
  other v3: 5.45,9.028 6.55,9.028 5.45,10.128 6.55,10.128 5.45,11.228 6.55,11.228
I2C_SCL: P3.6 U1.42 | length 52
  Top Layer w0.203: U1.42 34.294,11.515 34.671,11.891 34.671,16.171 34.468,16.374 v1(34.468,16.942)
  Bottom Layer w0.203: v1(34.468,16.942) 34.468,17.424 41.351,24.308 41.351,53.351 P3.6
I2C_SDA: P3.5 U1.43 | length 49.1
  Top Layer w0.203: U1.43 34.794,11.28 35.128,11.614 v1(35.128,16.942)
  Bottom Layer w0.203: v1(35.128,16.942) 35.128,17.383 41.808,24.064 41.808,51.268 P3.5
INT1: INT1.1 U1.18 U2.11 | length 17.5
  Top Layer w0.203: U2.11 23.622,18.796 INT1.1 27.178,22.352 32.794,22.352 34.794,20.352 U1.18
INT2: INT2.1 U1.19 U2.9 | length 17.2
  Top Layer w0.203: U2.9 21.745,17.796 21.768,17.772 21.768,17.702 21.887,17.583 24.187,17.583 INT2.1 28.499,21.895 32.605,21.895 34.294,20.205 U1.19
LED1: R7.1 U1.29 | length 38.9
  Top Layer w0.203: v1(28.448,14.732) 28.69,14.974 U1.29 ; v1(29.591,41.042) R7.1
  Bottom Layer w0.203: v1(28.448,14.732) 28.448,39.899 v1(29.591,41.042)
LED2: R21.1 U1.32 | length 42
  Top Layer w0.203: R21.1@19.249,49.43 19.249,45.89 v1@22.6,42.539 ; v1(27.813,13.877) 28.216,13.474 U1.32
  Bottom Layer w0.203: v1(22.606,42.545) 27.813,37.338 v1(27.813,13.877)
LED_GREEN: R11.1 U1.33 | length 37.9
  Top Layer w0.203: v1(28.169,12.84) 28.303,12.974 U1.33 ; v1(30.226,39.899) 33.934,43.608 v1(33.934,43.637)
  Bottom Layer w0.203: v1(28.169,12.84) 30.226,14.897 30.226,18.796 29.224,19.798 29.224,38.897 v1(30.226,39.899) ; v1(33.934,43.637) 34.656,44.359 R11.1
LPUART1_RX: R3.1 U1.22 | length 5.4
  Top Layer w0.203: U1.22 32.794,16.053 v1(33.844,15.003)
  Bottom Layer w0.203: v1(33.844,15.003) R3.1
LPUART1_TX: R4.1 U1.21 | length 4
  Top Layer w0.203: U1.21 33.294,16.679 v1(33.844,16.129)
  Bottom Layer w0.203: v1(33.844,16.129) R4.1
NetC1_2: C1.2 U1.3 Y1.1 | length 6.4
  Top Layer w0.203: U1.3 40.142,12.474 40.289,12.327 40.449,12.167 40.508,12.108 40.508,11.575 39.766,10.833 Y1.1 39.766,8.701 39.568,8.504 39.518,8.504 39.37,8.355 C1.2
NetC2_2: C2.2 U1.4 Y1.2 | length 6.8
  Top Layer w0.203: U1.4@38.594,12.978 40.284,12.978 41.266,11.997 Y1.2 C2.2
NetC3_2: C3.2 U1.5 YA1.1 | length 18.7
  Top Layer w0.203: U1.5@38.594,13.472 40.437,13.472 42.291,11.618 42.291,6.682 41.071,5.462 38.969,5.462 38.239,4.732 38.239,3.092 38.632,2.7 39.425,2.7 YA1.1 C3.2
NetC5_2: C5.2 R8.1 YA1.3 | length 4
  Top Layer w0.203: YA1.3 41.717,5.462 42.41,6.154 R8.1 44.146,6.154 C5.2
NetC10_2: C10.2 R10.1 R12.2 R13.2 | length 3.8
  Bottom Layer w0.203: R10.1 R12.2 R13.2 C10.2
NetC20_2: C20.2 J2.2 J3.2 U5.1 U5.3 U5_VIN.1 | length 10.3
  Top Layer w0.203: U5.3 5.086,17.77 5.646,17.77 6.172,18.296 6.172,18.844 5.698,19.318 5.082,19.318 U5.1
  Top Layer w0.508: J3.2 C20.2 ; J2.2 C20.2 ; U5.1 C20.2
NetD1_A: D1.A R9.1 | length 2.4
  Bottom Layer w0.203: R9.1 36.855,46.555 D1.A
NetD1_K: D1.K Q2.C | length 3.3
  Bottom Layer w0.203: Q2.C 36.612,49.571 D1.K
NetD2_A: D2.A D3.A R17.2 | length 4.2
  Bottom Layer w0.254: R17.2 3.821,17.667 4.271,17.217 D2.A D3.A
NetD2_K: D2.K U4.6 | length 13.4
  Top Layer w0.254: U4.6 v1(10.897,9.493)
  Bottom Layer w0.254: D2.K 9.656,17.217 10.897,15.977 v1(10.897,9.493)
NetD3_K: D3.K U4.7 | length 8.7
  Top Layer w0.254: U4.7 v1(10.109,10.763)
  Bottom Layer w0.254: D3.K 9.246,15.087 10.109,14.224 v1@10.109,10.744
NetD4_2: D4.2 Q1.1 R16.2 R18.2 | length 7.4
  Top Layer w0.508: Q1.1@13.233,14.954 D4.2 13.235,12.566 15.044,12.566 15.595,12.014 15.935,12.014 R16.2 R18.2
NetJ1_1: J1.1 L1.2 | length 3.8
  Top Layer w0.508: J1.1 L1.2
NetL1_1: L1.1 R14.2 R15.2 | length 2.6
  Top Layer w0.203: R15.2 R14.2
  Top Layer w0.508: L1.1 R15.2
NetP1_2: P1.2 R4.2 | length 10.8
  Bottom Layer w0.203: R4.2 41.069,16.129 P1.2
NetP1_3: P1.3 R3.2 | length 10.2
  Bottom Layer w0.203: R3.2 42.483,15.003 P1.3
NetP1_4: P1.4 R2.1 | length 9.6
  Bottom Layer w0.203: R2.1 42.129,13.877 43.633,15.38 P1.4
NetP1_5: P1.5 R1.2 | length 9
  Bottom Layer w0.203: R1.2 45.311,12.751 P1.5
NetP4_1: P4.1 R5.1 | length 3.6
  Top Layer w0.406: R5.1 29.591,55.991 P4.1
NetP4_2: P4.2 Q3.C | length 3.3
  Top Layer w0.406: Q3.C P4.2
NetP5_1: P5.1 R16.1 VIN.1 | length 13
  Top Layer w0.508: R16.1 v2(19.685,8.768)
  Bottom Layer w0.508: v2(19.685,8.768) 25.751,8.768 27.3,7.219 P5.1
NetP9_1: P9.1 R20.1 | length 6.7
  Top Layer w0.406: R20.1 20.501,57.4 P9.1
NetP9_2: P9.2 Q4.C | length 5.9
  Top Layer w0.406: Q4.C 21.74,54.125 24.25,56.635 P9.2
NetQ2_B: Q2.B R11.2 | length 1.6
  Bottom Layer w0.203: R11.2 Q2.B
NetQ3_B: Q3.B R7.2 | length 1.7
  Top Layer w0.203: R7.2 Q3.B
NetQ4_B: Q4.B R21.2 | length 1.5
  Top Layer w0.203: R21.2 Q4.B
NetR6_1: R6.1 U1.44 | length 2.1
  Top Layer w0.203: R6.1 U1.44
NetR8_2: R8.2 U1.6 | length 10
  Top Layer w0.203: U1.6 40.594,13.974 43.18,11.388 R8.2
NetR14_1: R14.1 U3.13 | length 2.4
  Top Layer w0.203: R14.1 U3.13
NetR19_2: R19.2 U4.2 | length 2
  Top Layer w0.406: R19.2 U4.2
NRST: C4.2 P2.5 S1.1 S1.2 U1.7 | length 88.9
  Top Layer w0.203: U1.7 40.741,14.474 43.917,11.298 v1(43.917,10.058) ; v1(40.538,46.162) v1(45.4,41.3)
  Bottom Layer w0.203: P2.5 24.339,10.058 26.949,10.058 29.789,7.219 38.14,7.219 39.202,8.28 42.139,8.28 v1(43.917,10.058) 43.917,10.617 44.831,11.532 45.868,11.532 47.422,13.085 47.422,39.279 v1(45.4,41.3) ; S1.1 34.05,54.518 34.398,54.17 34.398,54.12 35.44,53.078 C4.2 38.311,53.078 ; S1.2 39.75,54.518 39.402,54.17 39.402,54.12 38.36,53.078 38.311,53.078 ; v1(40.538,46.162) 40.538,50.851 38.311,53.078
PA15: P8.2 U1.38 | length 68.2
  Top Layer w0.203: v1(31.877,8.07) 32.294,8.487 U1.38
  Bottom Layer w0.203: P8.2 10.419,52.121 19.777,52.121 22.921,48.977 22.94,48.977 25.356,46.562 25.356,46.453 31.064,40.745 31.064,12.261 31.877,11.448 v1(31.877,8.07)
PB3: P8.3 U1.39 | length 66.2
  Top Layer w0.203: v1(32.794,8.07) U1.39
  Bottom Layer w0.203: P8.3 12.502,52.578 19.986,52.578 31.521,41.042 31.521,12.45 32.794,11.177 v1(32.794,8.07)
PB4: P8.4 U1.40 | length 60
  Top Layer w0.203: v1@32.979,11.901 33.283,11.598 U1.40@33.283,10.185
  Bottom Layer w0.203: P8.4 14.585,53.035 20.175,53.035 31.979,41.232 31.979,12.882 v1(32.969,11.891)
PB5: P8.5 U1.41 | length 58.1
  Top Layer w0.203: U1.41 v1(33.794,11.891)
  Bottom Layer w0.203: P8.5 16.668,53.492 20.364,53.492 32.436,41.421 32.436,13.249 v1(33.794,11.891)
PB8: P3.4 U1.45 | length 46.1
  Top Layer w0.203: v1(35.789,16.942) 35.794,16.936 U1.45
  Bottom Layer w0.203: v1(35.789,16.942) 35.789,17.348 42.266,23.825 42.266,49.186 P3.4
PB9: P3.3 U1.46 | length 43.4
  Top Layer w0.203: U1.46 36.294,15.819 36.449,15.974 v1(36.449,16.942)
  Bottom Layer w0.203: v1(36.449,16.942) 36.449,17.323 42.723,23.597 42.723,47.103 P3.3
PC13: P3.2 U1.2 | length 40.1
  Top Layer w0.203: v1(37.109,16.942) 37.109,12.167 37.302,11.974 U1.2
  Bottom Layer w0.203: v1(37.109,16.942) 43.231,23.063 43.231,45.074 P3.2@45.397,47.24
RX_EN: RX_EN.1 U1.20 U3.9 | length 26.5
  Top Layer w0.203: v1(33.294,35.535) 35.732,37.973 U3.9 RX_EN.1 ; v1(33.299,20.355) 33.299,20.35 33.794,19.855 U1.20
  Bottom Layer w0.203: v1(33.294,35.535) 33.297,35.532 33.297,20.358 v1(33.299,20.355)
SOLAR+: P6.1 Q1.3 SOLAR+.1 | length 32.7
  Top Layer w0.508: Q1.3 SOLAR+.1 v1(14.183,20.777)
  Bottom Layer w0.508: v1(14.183,20.777) 14.183,36.183 P6.1
SPI1_CS: CS1.1 U1.12 U3.7 | length 22.7
  Top Layer w0.203: U1.12 38.594,17.981 CS1.1 42.34,21.727 42.34,34.163 41.07,35.433 U3.7
SPI1_MISO: MISO1.1 U1.16 U3.4 | length 16.3
  Top Layer w0.203: U1.16 35.794,21.401 35.294,21.901 MISO1.1 35.294,30.231 36.686,31.623 U3.4
SPI1_MOSI: MOSI1.1 U1.17 U3.2 | length 15.8
  Top Layer w0.203: v1(34.294,29.083) 34.294,24.371 MOSI1.1 34.294,21.59 35.294,20.59 U1.17 ; v1(37.109,29.083) U3.2
  Bottom Layer w0.203: v1(34.294,29.083) v1(37.109,29.083)
SPI1_SCLK: SCLK1.1 U1.15 U3.3 | length 14.2
  Top Layer w0.203: U1.15 SCLK1.1 36.294,29.538 37.109,30.353 U3.3
SPI2_CS: CS2.1 U1.25 U2.8 | length 10.6
  Top Layer w0.203: U2.8 20.82,17.471 21.317,16.974 24.449,16.974 25.255,17.78 CS2.1 27.641,17.78 28.447,16.974 U1.25
SPI2_MISO: MISO2.1 U1.27 U2.7 | length 11.1
  Top Layer w0.203: U2.7 20.32,16.962 21.308,15.974 22.352,15.974 U1.27
SPI2_MOSI: MOSI2.1 U1.28 U2.6 | length 12.3
  Top Layer w0.203: U2.6 19.82,16.816 21.549,15.087 MOSI2.1 24.638,15.087 25.025,15.474 U1.28
SPI2_SCLK: SCLK2.1 U1.26 U2.4 | length 15.8
  Top Layer w0.203: v1@17.399,16.764 17.399,17.399 18.296,18.296 U2.4 ; v1(27.121,16.721) 27.121,16.703 27.341,16.482 30.486,16.482 U1.26
  Bottom Layer w0.203: v1(17.399,16.721) 18.842,16.721 v1(27.121,16.721)
SWCLK: P2.3 P5.3 U1.37 | length 16.4
  Top Layer w0.203: P5.3 24.373,7.373 ; P2.3 24.604,12.132 24.373,11.901 24.373,8.768 24.373,7.373 ; U1.37 31.794,9.028 30.139,7.373 24.373,7.373
SWDIO: P2.2 P5.2 U1.34 | length 12.1
  Top Layer w0.203: v1(25.1,8.057) 25.1,8.933 27.341,11.174 ; P2.2 25.854,11.79 26.47,11.174 27.341,11.174 ; U1.34 28.641,12.474 27.341,11.174
  Bottom Layer w0.203: P5.2 v1(25.1,8.057)
TX_EN: TX_EN.1 U1.11 U3.8 | length 25.9
  Top Layer w0.203: U1.11 39.724,16.474 TX_EN.1 42.799,19.549 42.799,35.535 41.631,36.703 U3.8
USART1_RX: R1.1 U1.31 | length 5.5
  Top Layer w0.203: U1.31 32.621,13.974 v1(33.844,12.751)
  Bottom Layer w0.203: v1(33.844,12.751) R1.1
USART1_TX: R2.2 U1.30 | length 5.2
  Top Layer w0.203: U1.30 33.247,14.474 v1(33.844,13.877)
  Bottom Layer w0.203: v1(33.844,13.877) R2.2
VCC: C18.1 D4.1 Q1.2 R17.1 U4.4 U4.8 | length 10.7
  Top Layer w0.508: v2(3.275,6.858) U4.4 ; C18.1 v2(8.725,13.818) U4.8 ; v2(10.897,6.858) 11.524,6.858 D4.1 ; Q1.2@15.133,14.954 v2(16.281,14.954)
  Bottom Layer w0.508: v2(3.275,15.443) R17.1
VCC_3V: C6.2 C7.2 C8.2 C9.2 C11.2 C12.2 C13.1 C14.1 C15.1 C16.2 C19.2 P2.6 R5.2 R9.2 R20.2 U1.1 U1.9 U1.24 U1.36 U1.48 U2.1 U2.14 U3.11 U5.5 VCC_3V.1 | length 38.3
  Top Layer w0.203: U2.1 C13.1 C14.1 v1(19.007,23.868) ; U2.14 C15.1 C16.2 v1(20.82,23.868) ; v2(29.224,18.274) U1.24 ; v1(30.494,9.398) U1.36 ; U1.48 37.794,9.674 C7.2 38.194,7.982 C6.2 38.194,7.062 38.492,6.764 38.542,6.764 39.171,6.135 39.331,6.135 v1(39.37,6.096) ; C6.2@38.537,7.455 38.537,11.474 U1.1 ; U1.9 40.907,15.474 41.407,15.974 C12.2 C11.2 v1(43.089,17.228)
  Top Layer w0.508: U5.5 C19.2 ; C19.2@8.725,19.538 VCC_3V.1 v2(8.725,22.606) ; v1(17.526,51.268) R20.2 ; v2(28.448,53.525) R5.2 ; U3.11 v1(40.589,40.513)
  Bottom Layer w0.203: R9.2 v1(36.9,44.813)
VCC_5V: J2.1 P1.1 P8.1 | length 1.6
  Top Layer w0.508: J2.1 v1(2.463,25.4)
pads on no net: J1.2 P2.4 U2.2 U2.15 U3.10 U5.4 YA1.2 YA1.4

## Polygon pours and split planes (outlines as drawn)
GND on Bottom Layer "Bottom Layer-GND" (solid, remove dead copper, pour order 6): -6,0 48,0 48,60 -6,60
GND on Top Layer "Top Layer-GND" (solid, remove dead copper, pour order 4): -6,0 48,0 48,60 -6,60
BAT+ on POWER Plane (split plane): 16.778,19.93 16.89,19.903 16.997,19.858 17.095,19.798 17.183,19.723 17.258,19.635 17.318,19.537 17.363,19.43 17.39,19.318 17.398,19.21 17.397,19.202 17.397,17.12 17.398,17.112 17.39,17.004 17.363,16.892 17.318,16.785 17.258,16.687 17.183,16.599 17.095,16.524 16.997,16.464 16.89,16.419 16.778,16.392 16.675,16.384 16.665,16.385 16.662,16.385 2.896,16.385 2.893,16.385 2.766,16.377 2.639,16.351 2.516,16.31 2.399,16.252 2.291,16.18 2.194,16.094 2.108,15.997 2.036,15.889 1.978,15.772 1.937,15.649 1.911,15.522 1.903,15.395 1.903,15.392 1.903,6.858 1.903,6.855 1.911,6.728 1.937,6.601 1.978,6.478 2.036,6.362 2.108,6.254 2.194,6.156 2.291,6.07 2.399,5.998 2.516,5.941 2.639,5.899 2.766,5.874 2.893,5.865 2.896,5.865 10.499,5.865 10.494,5.859 10.39,5.719 10.3,5.569 10.225,5.411 10.167,5.247 10.124,5.077 10.098,4.904 10.09,4.736 10.09,4.73 10.09,1.27 10.091,1.257 10.082,1.151 10.055,1.035 10.009,0.924 9.946,0.822 9.869,0.731 9.778,0.654 9.676,0.591 9.565,0.545 9.449,0.518 9.343,0.509 9.33,0.51 1.27,0.51 1.257,0.509 1.151,0.518 1.035,0.545 0.924,0.591 0.822,0.654 0.731,0.731 0.654,0.822 0.591,0.924 0.545,1.035 0.518,1.151 0.509,1.257 0.51,1.27 0.51,18.796 0.51,18.802 0.502,18.97 0.476,19.143 0.433,19.313 0.375,19.477 0.3,19.635 0.21,19.785 0.106,19.925 0.096,19.937 3.556,19.937 16.662,19.937 16.67,19.938
VCC_5V on POWER Plane (split plane): 46.736,59.487 46.747,59.488 46.852,59.479 46.967,59.452 47.077,59.406 47.179,59.344 47.27,59.267 47.347,59.176 47.409,59.074 47.455,58.964 47.482,58.849 47.491,58.741 47.49,58.727 47.49,21.313 45.11,21.313 45.101,21.311 44.961,21.32 44.815,21.35 44.673,21.398 44.539,21.464 44.415,21.547 44.302,21.645 44.204,21.758 44.121,21.882 44.054,22.016 44.006,22.158 43.977,22.304 43.968,22.445 43.97,22.454 43.97,54.864 43.969,54.866 43.961,55.021 43.935,55.175 43.891,55.326 43.831,55.471 43.755,55.608 43.664,55.736 43.56,55.853 43.443,55.958 43.315,56.049 43.177,56.125 43.033,56.185 42.882,56.228 42.727,56.254 42.572,56.263 42.57,56.263 4.826,56.263 4.824,56.263 4.669,56.254 4.515,56.228 4.364,56.185 4.219,56.125 4.082,56.049 3.954,55.958 3.837,55.853 3.732,55.736 3.641,55.608 3.565,55.471 3.505,55.326 3.462,55.175 3.436,55.021 3.427,54.866 3.427,54.864 3.427,20.195 1.778,20.195 1.778,59.49 46.705,59.49
VCC_3V on POWER Plane (split plane): 184 vertices, not listed, extent 3.684,0.509 47.491,56.006
VCC on POWER Plane (split plane): 2.896,16.127 16.662,16.127 16.665,16.127 16.675,16.128 16.778,16.12 16.89,16.093 16.997,16.048 17.095,15.988 17.183,15.913 17.258,15.825 17.318,15.727 17.363,15.62 17.39,15.508 17.398,15.4 17.397,15.392 17.397,6.51 11.87,6.51 11.864,6.51 11.696,6.502 11.523,6.476 11.353,6.433 11.189,6.375 11.031,6.3 10.881,6.21 10.765,6.124 2.896,6.124 2.888,6.122 2.78,6.131 2.668,6.158 2.561,6.202 2.463,6.262 2.375,6.337 2.3,6.425 2.24,6.524 2.195,6.63 2.168,6.743 2.16,6.85 2.161,6.858 2.161,15.392 2.16,15.4 2.168,15.508 2.195,15.62 2.24,15.727 2.3,15.825 2.375,15.913 2.463,15.988 2.561,16.048 2.668,16.093 2.78,16.12 2.888,16.128
GND on GND Plane (split plane): 176 vertices, not listed, extent -0.022,0.509 47.491,59.49

## Keep-outs
Keep-Out Layer:
  lines w0.254: 46.736,59.997 cw(c46.733,58.73) 48,58.727 48,1.27 cw(c46.73,1.27) 46.73,0 38.67,0 cw(c38.67,1.27) 37.4,1.27 37.4,4.73 ccw(c36.13,4.73) 36.13,6 29.42,6 ccw(c29.42,4.73) 28.15,4.73 cw(c27.515,4.73) 27.515,4.095 20.485,4.095 cw(c20.485,4.73) 19.85,4.73 ccw(c18.58,4.73) 18.58,6 11.87,6 ccw(c11.87,4.73) 10.6,4.73 10.6,1.27 cw(c9.33,1.27) 9.33,0 1.27,0 cw(c1.27,1.27) 0,1.27 0,18.796 ccw(c-1.27,18.796) -1.27,20.066 -4.73,20.066 cw(c-4.73,21.336) -6,21.336 -6,58.73 cw(c-4.73,58.73) -4.73,60 46.736,60

## Other copper
Top Layer:
  pour cut-out: 1.653,39.116 5.7,39.116 cw(c4.988,38.799) 5.7,38.481 1.653,38.481
  pour cut-out: -6,60 -6,20.054 1.778,20.067 1.778,59.995 -5.995,59.995
Bottom Layer:
  pour cut-out: -6,60 -6,20.054 1.778,20.067 1.778,59.995 -5.995,59.995
GND Plane (plane layer: these items are gaps in the copper):
  pour cut-out: -6,60 -6,20.054 1.778,20.067 1.778,59.995 -5.995,59.995
POWER Plane (plane layer: these items are gaps in the copper):
  pour cut-out: -6,60 -6,20.054 1.778,20.067 1.778,59.995 -5.995,59.995
  pour cut-out: 6.327,9.906 5.673,9.906 5.673,9.22 6.327,9.22
  pour cut-out: 6.327,11.024 5.673,11.024 5.673,10.338 6.327,10.338
  lines w0.254: -1.27,20.066 16.662,20.066 cw(c16.662,19.202) 17.526,19.202 17.526,17.12 cw(c16.662,17.12) 16.662,16.256 ; 3.556,20.066 3.556,54.864 cw(c4.826,54.864) 4.826,56.134 42.57,56.134 cw(c42.57,54.864) 43.84,54.864 43.84,22.454 ccw(c45.11,22.454) 45.11,21.184 48.006,21.184 ; 11.938,5.994 2.896,5.994 cw(c2.896,6.858) 2.032,6.858 2.032,15.392 cw(c2.896,15.392) 2.896,16.256 16.662,16.256 ; 17.526,5.994 17.526,15.392 ccw(c16.662,15.392) 16.662,16.256

## Silkscreen, mask and mechanical layers (free items; w line width, h text height)
Top Overlay:
  text "PA15" at 4.116,59.004 h0.66
  text "PB3" at 7.106,59.004 h0.66
  text "PB4" at 9.547,59.004 h0.66
  text "PB5" at 11.987,59.004 h0.66
  text "GND" at 14.427,59.004 h0.66
  text "I2C_SCL" at 39.446,57.082 h0.66
  text "VCC_5V" at 0.729,55.05 h0.66
  text "I2C_SDA" at 39.446,54.432 h0.66
  text "PB8" at 41.977,51.892 h0.66
  text "PB9" at 41.977,49.352 h0.66
  text "SOLAR" at 28.296,47.142 h0.66 r90
  text "RFID_CC1101 / 433MHz / Rev3.0 / 2022.2.16" at 1.905,47.117 h1.02
  text "PC13" at 41.427,46.812 h0.66
  text "GND" at 41.977,44.272 h0.66
  text "VCC_5V" at 47.687,21.793 h0.66 r90
  text "LTX" at 47.687,19.017 h0.66 r90
  text "LRX" at 47.687,16.24 h0.66 r90
  text "TX" at 47.687,14.124 h0.66 r90
  text "RX" at 47.687,12.008 h0.66 r90
  text "GND" at 47.687,9.231 h0.66 r90
Bottom Overlay:
  text "BAT" at 4.572,4.826 h0.66
Drill Drawing:
  lines w0.254: 11.45,0 11.45,5 19.45,5 19.45,0 28.525,0 ; 28.55,0.025 28.55,5 36.55,5 36.55,0 ; 28.55,4.975 cw(c28.575,4.975) 28.575,5 ; 48,0 ccw(c48,0) 48,0 ; 48,0 ccw(c48,0) 48,0 ; 48,0 ccw(c48,0) 48,0

## Dimensions
-7.112,59.995 to 0,0 on Top Layer
0,0 to 48,0 on Top Layer

## Text inside footprints (layer, text, board x,y; h text height)
P2: Top Overlay "VREF" at 19.211,8.971 h0.66; Top Overlay "NRST" at 20.142,10.033 h0.66; Top Overlay "SWO" at 22.989,10.693 h0.66 r270; Top Overlay "SWCLK" at 24.155,10.033 h0.66; Top Overlay "SWDIO" at 25.303,8.971 h0.66
P5: Top Overlay "VCC" at 26.416,7.417 h0.66; Top Overlay "DM" at 24.536,7.417 h0.66; Top Overlay "DP" at 22.352,7.417 h0.66; Top Overlay "GND" at 19.837,7.391 h0.66
U3: Top Overlay "E07-433M20S-V1.0" at 28.854,34.798 h0.9 r180; Top Overlay "ANT" at 10.665,39.238 h0.7 r180; Top Overlay "GND" at 10.595,37.128 h0.7 r180; Top Overlay "GND" at 10.605,33.078 h0.7 r180; Top Overlay "GND" at 10.605,31.078 h0.7 r180; Top Overlay "GND" at 37.215,42.118 h0.7 r180; Top Overlay "VCC" at 37.215,40.818 h0.7 r180; Top Overlay "NC" at 37.215,39.568 h0.7 r180; Top Overlay "RXEN" at 37.215,38.268 h0.7 r180; Top Overlay "TXEN" at 37.215,37.018 h0.7 r180; Top Overlay "CSN" at 37.215,35.668 h0.7 r180; Top Overlay "GDO0" at 37.215,34.468 h0.7 r180; Top Overlay "GDO2" at 37.215,33.168 h0.7 r180; Top Overlay "MISO" at 37.215,31.968 h0.7 r180; Top Overlay "SCK" at 37.215,30.668 h0.7 r180; Top Overlay "MOSI" at 37.215,29.418 h0.7 r180; Top Overlay "GND" at 37.215,28.168 h0.7 r180